# Altium PCB EPS ARM EUTS.PcbDoc
Units mil, origin at the board's own origin, x right, y up, seen from the top; angles counter-clockwise.
Board outline 3757.87 x 3555.12 mil, 4 copper layers (Top Layer, Ground, Power, Bottom Layer), stack 64.6 mil thick; 73 components, 76 nets, 354 pads, 124 vias.
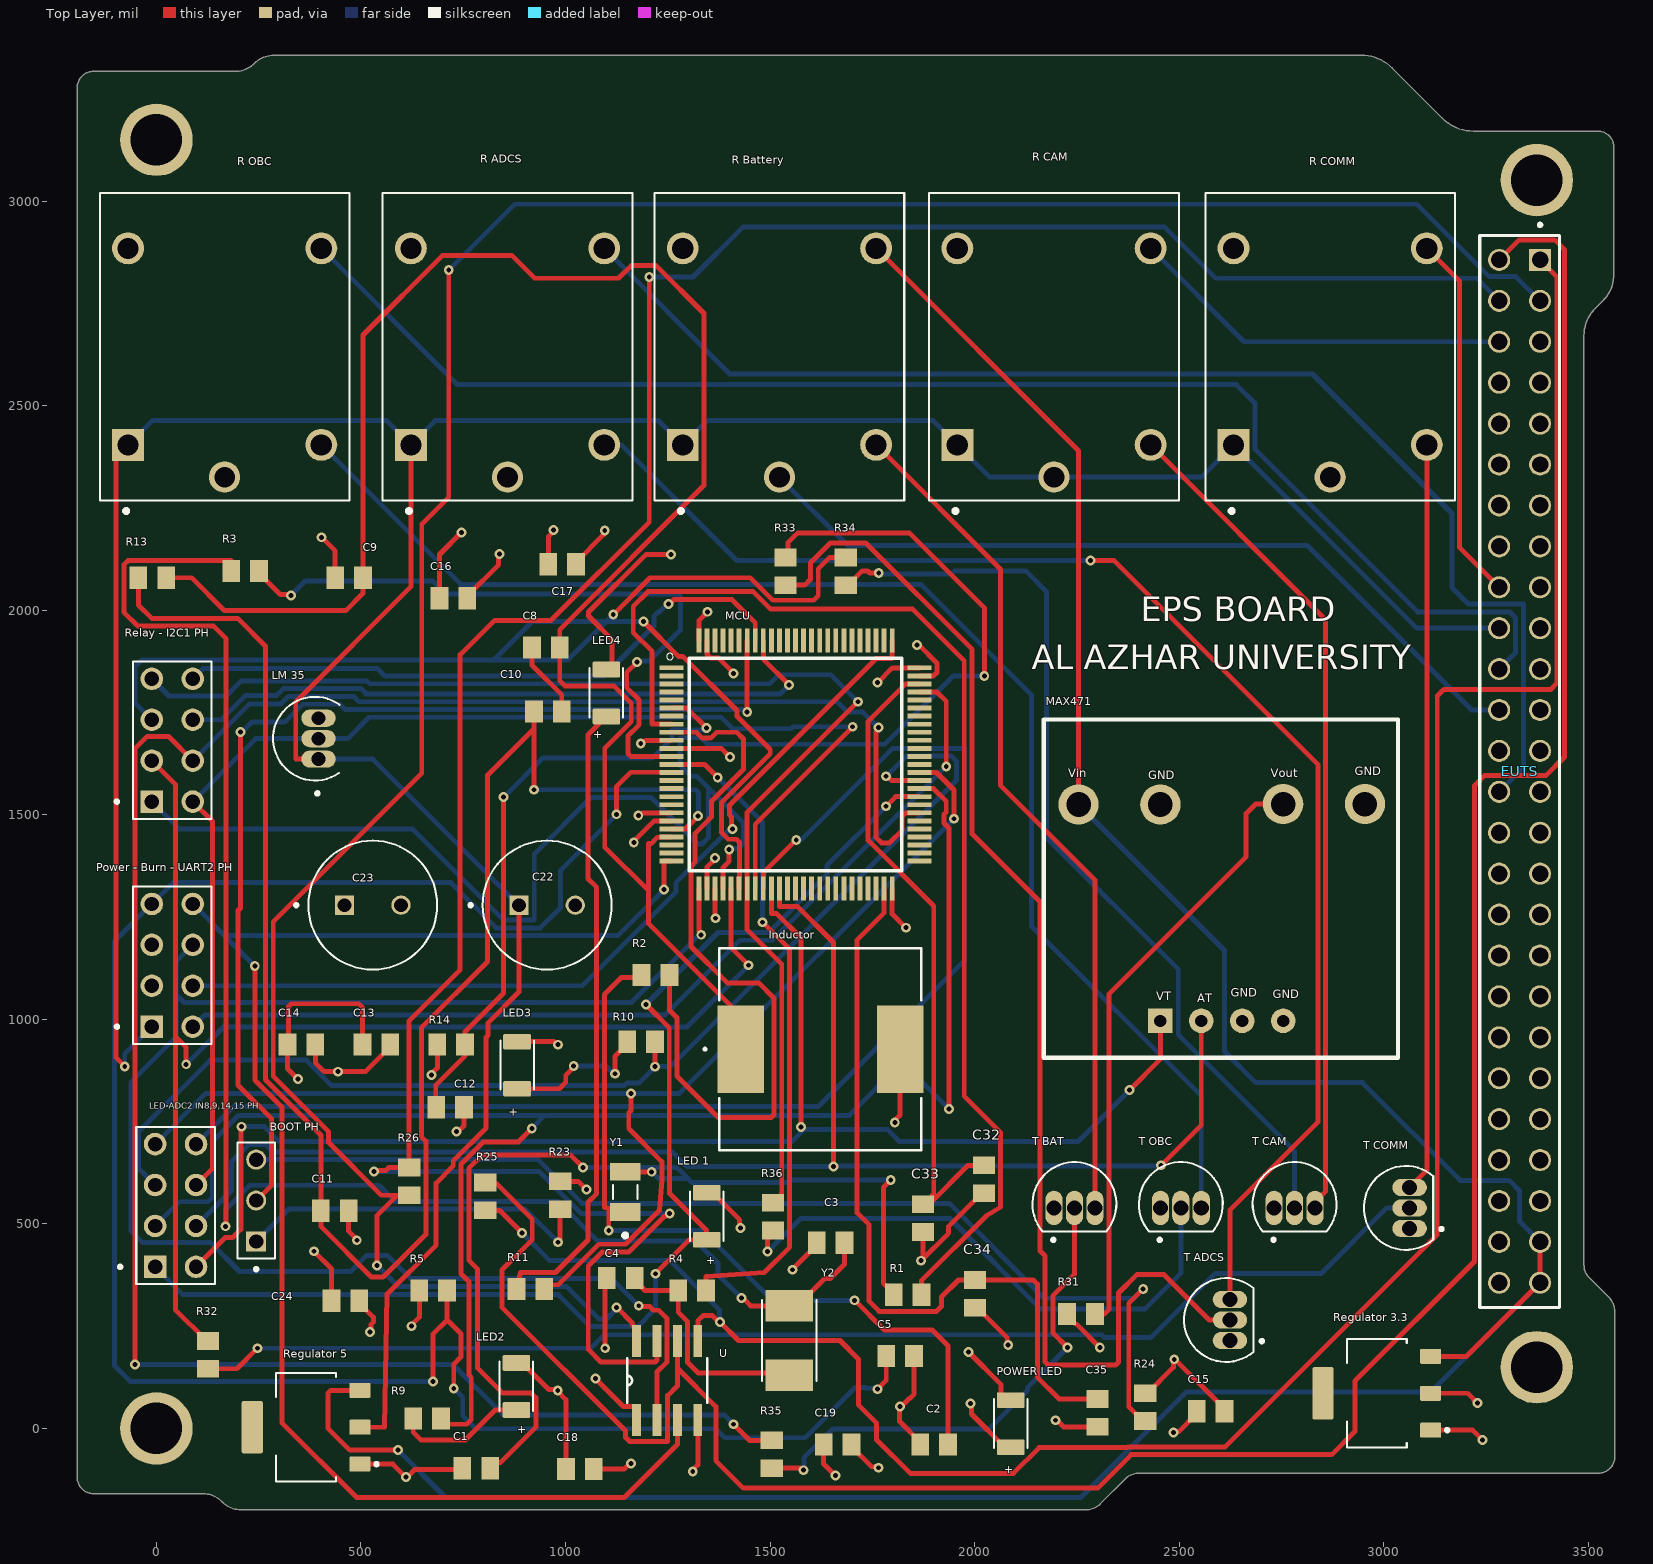
[diagram p0: Top Layer view]
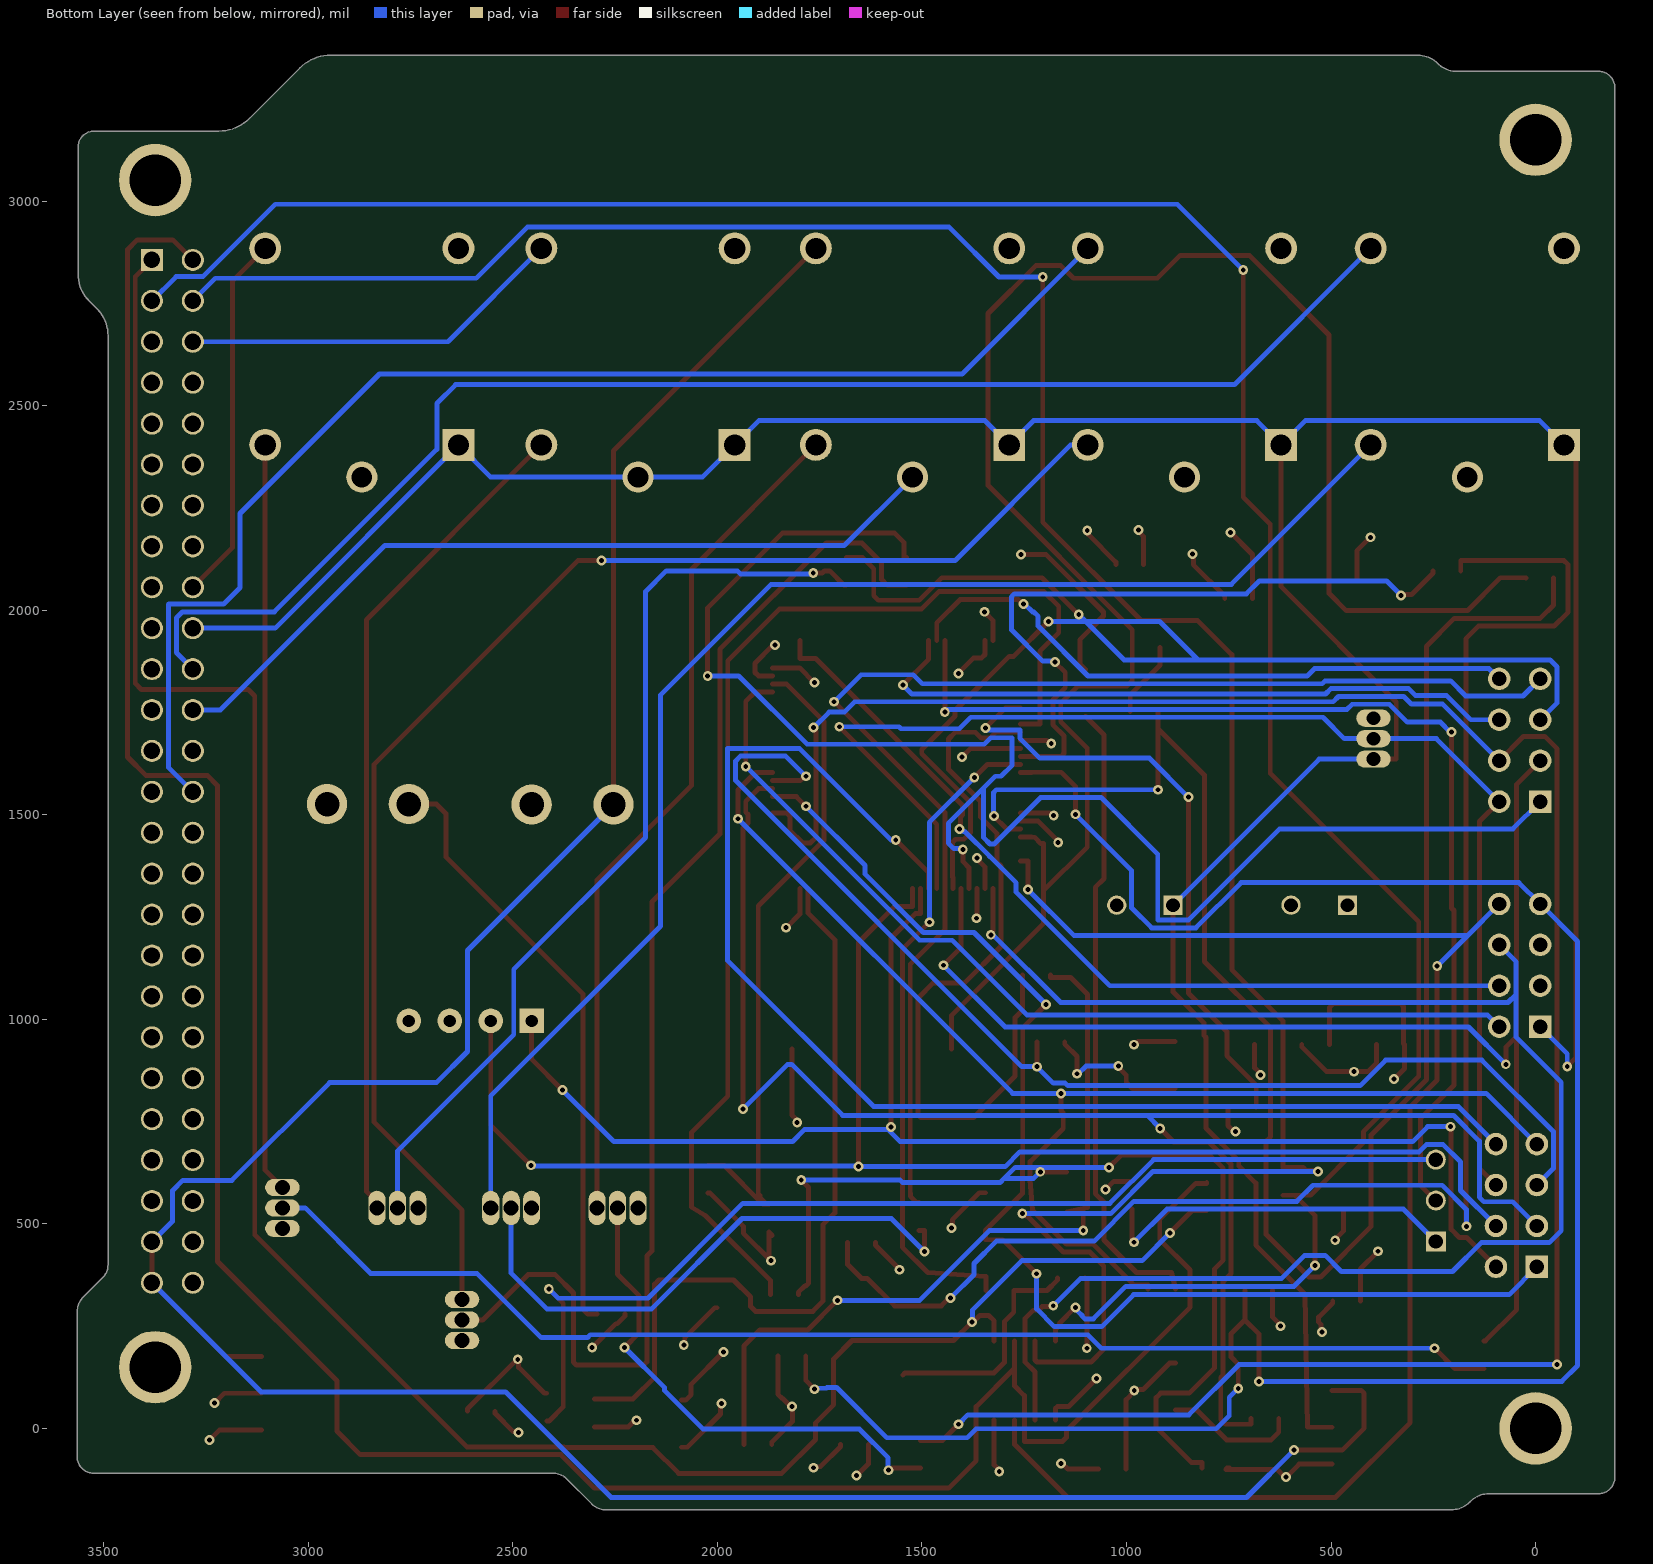
[diagram p1: Bottom Layer view, seen from below]
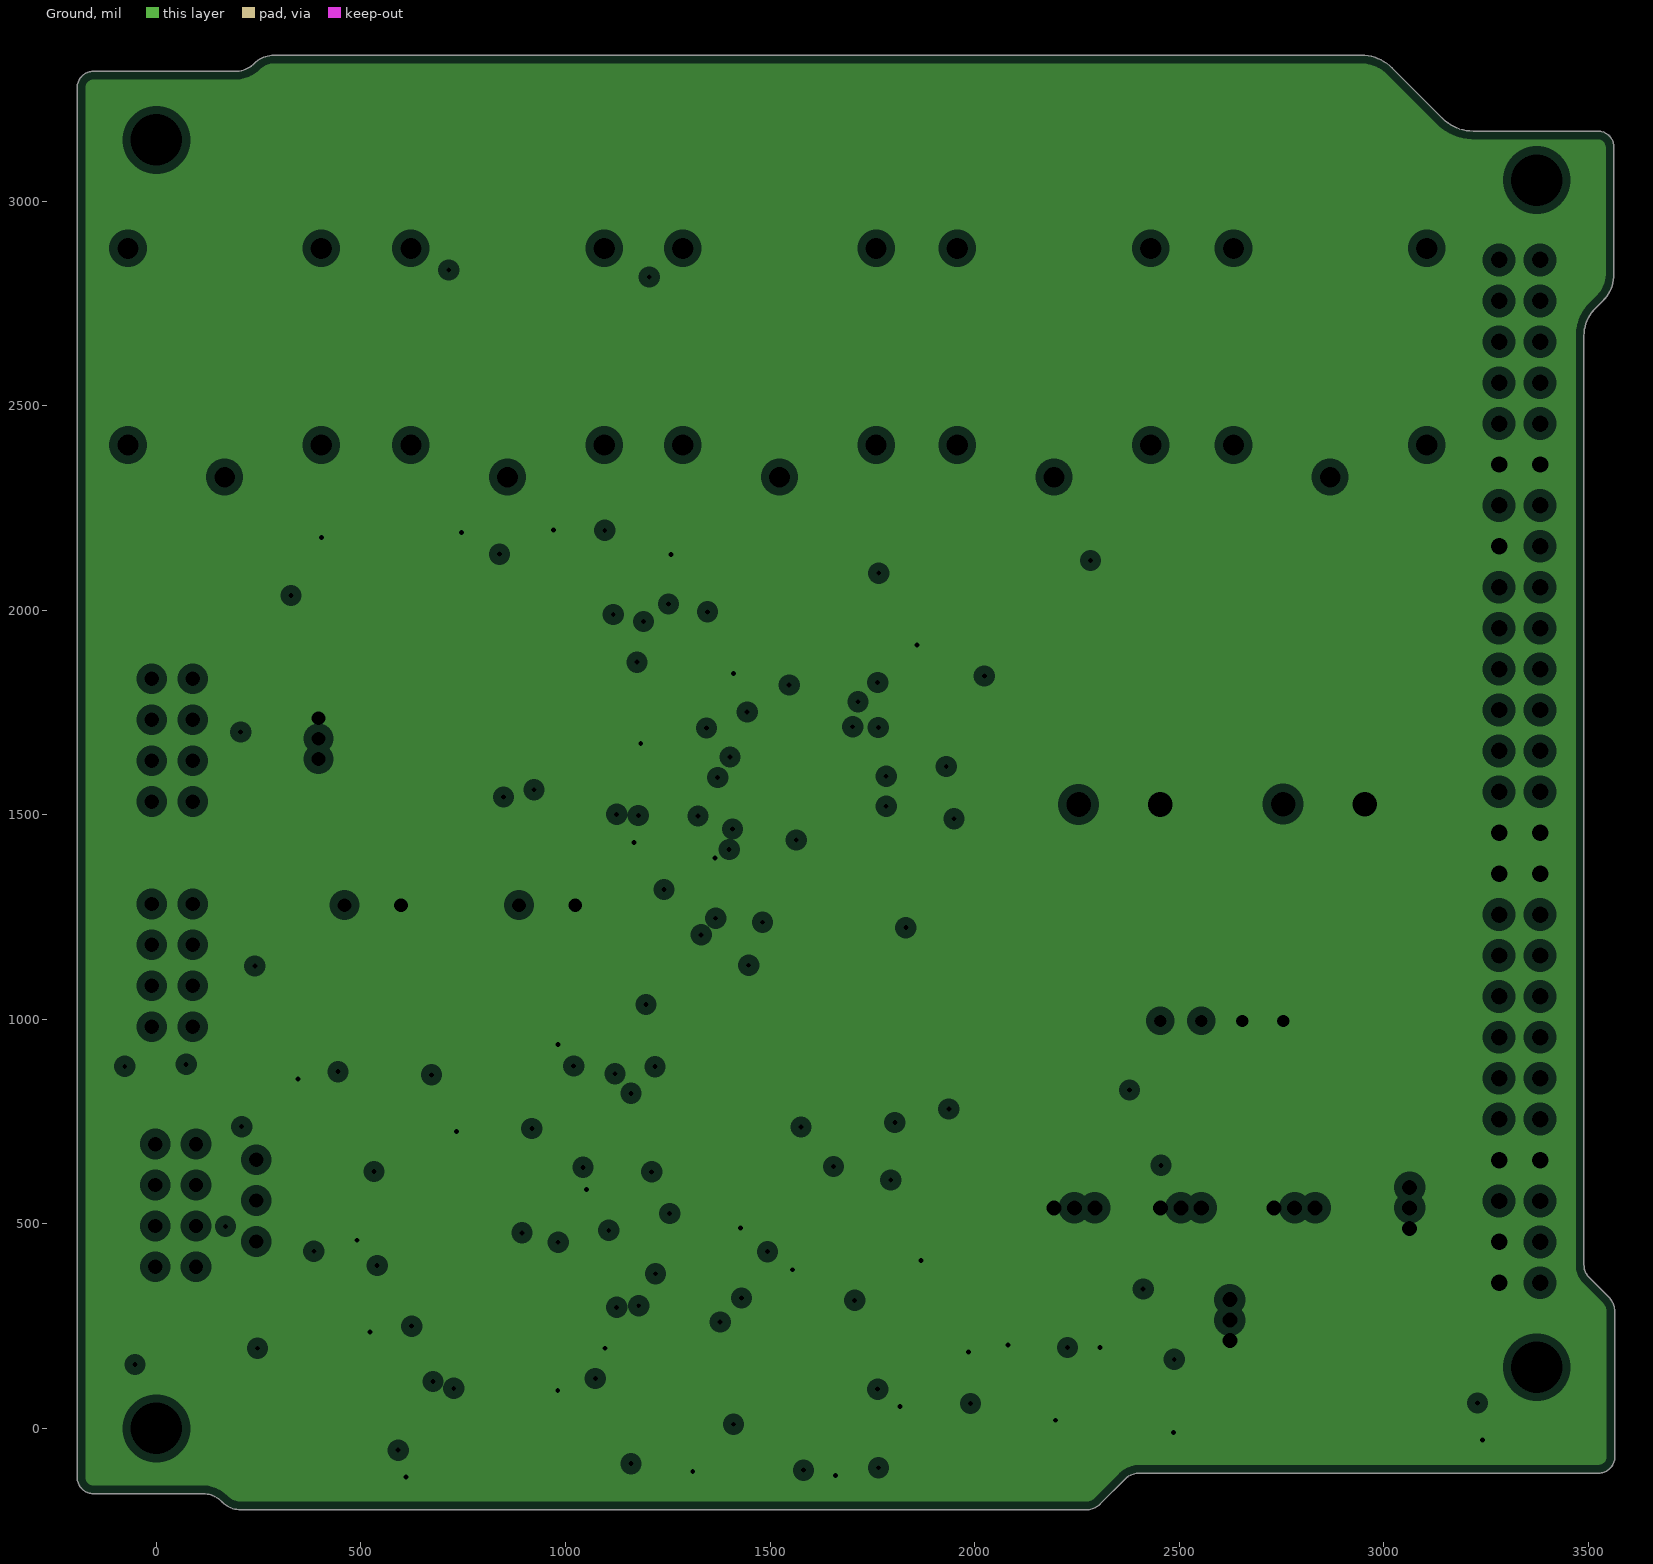
[diagram p2: Ground, clearances drawn from the general rule]
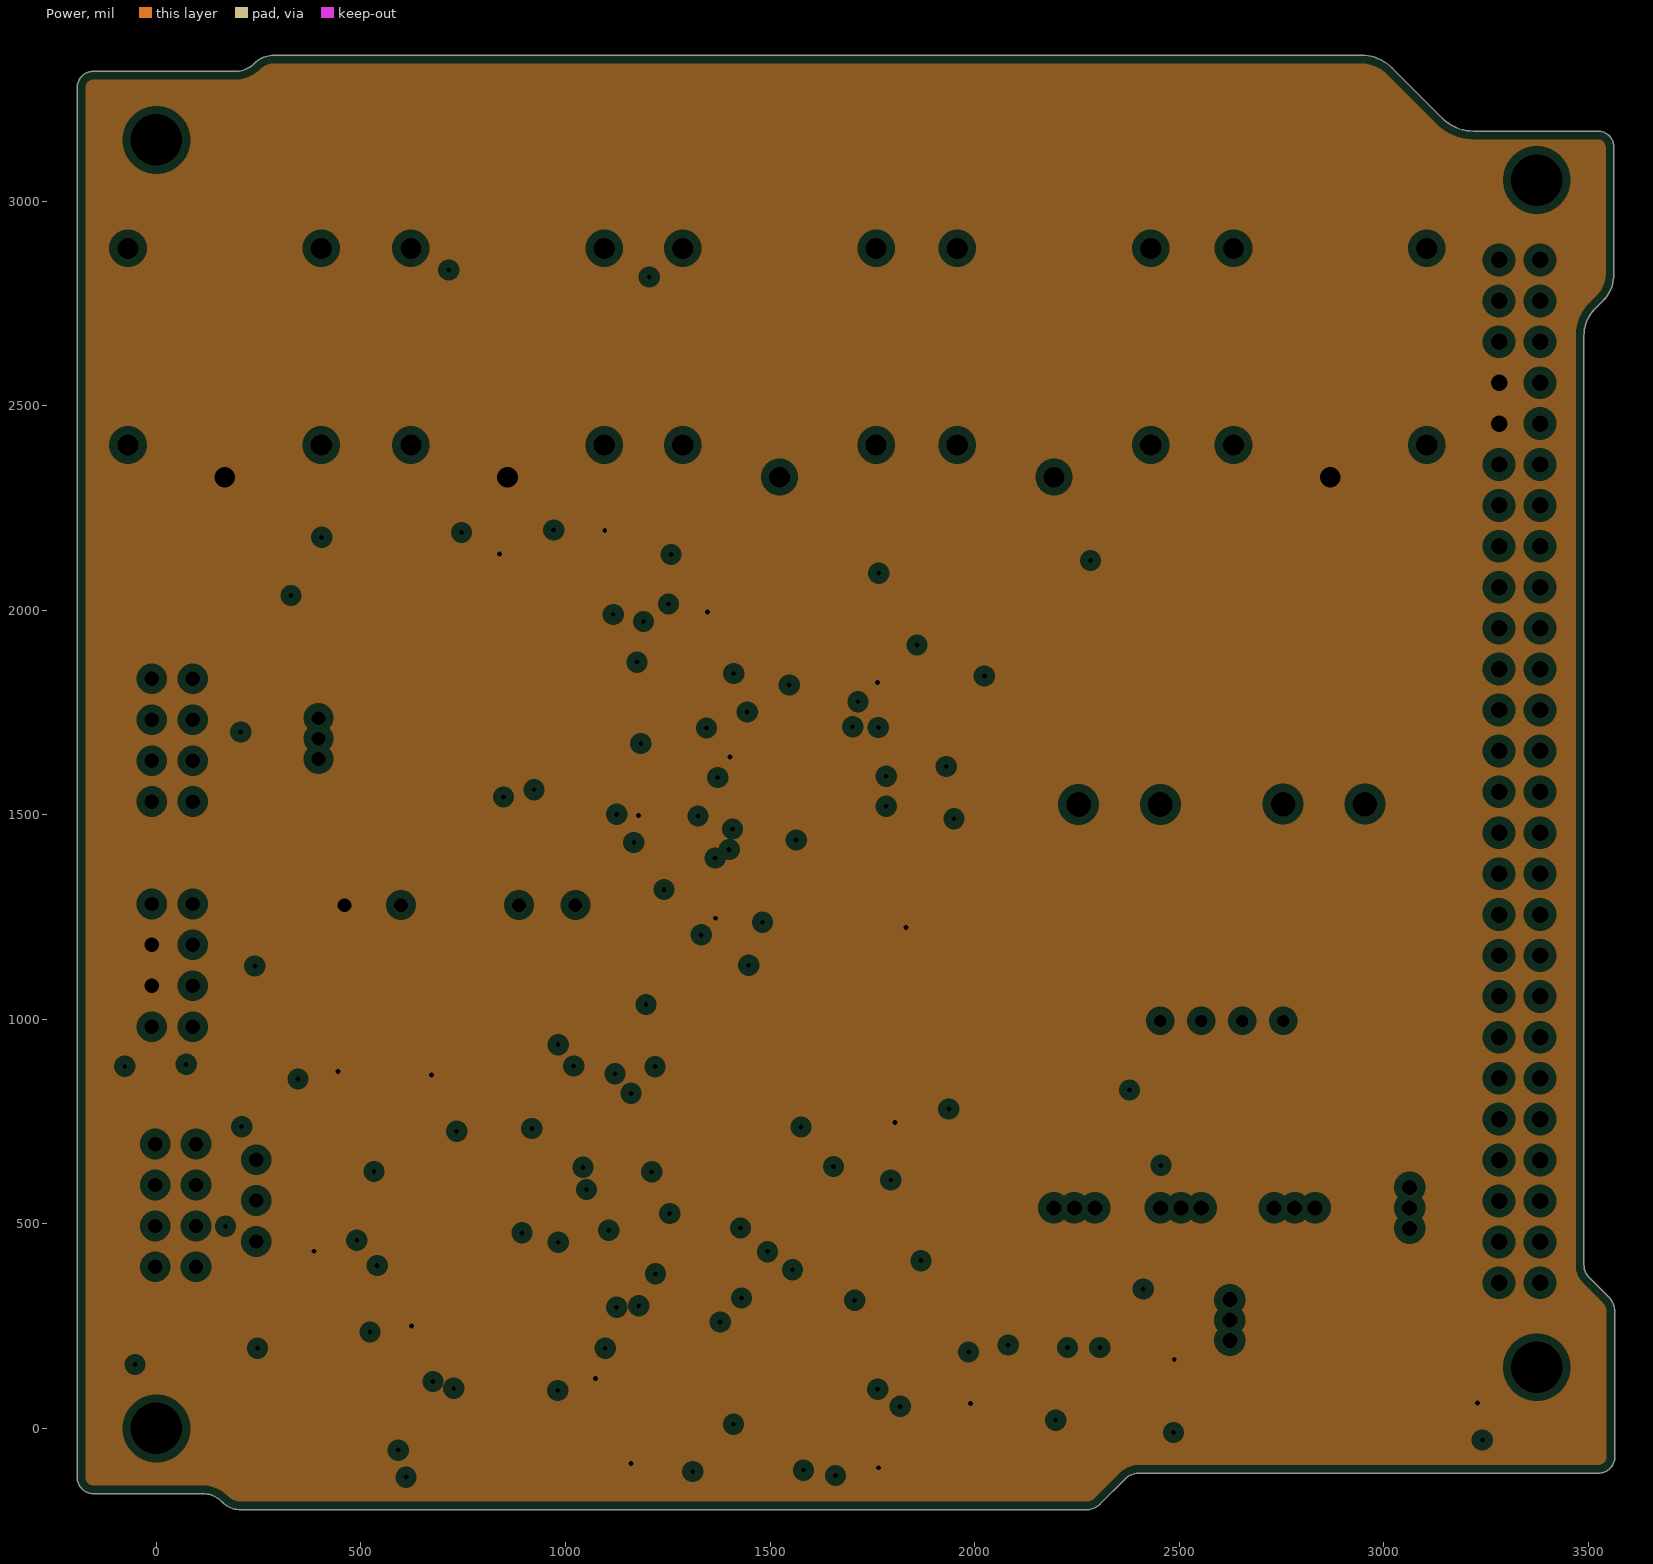
[diagram p3: Power, clearances drawn from the general rule]

## Layer stack, top to bottom
Top Solder: solder mask 0.4, Solder Resist, Dk 3.5
Top Layer: signal copper 1.4
Dielectric 1: prepreg 6.7, FR-4, Dk 4.35
Ground: plane copper 0.7, net G
Dielectric 3: core 47, FR-4, Dk 4.35
Power: plane copper 0.7, net 3.3V
Dielectric 2: prepreg 6.7, FR-4, Dk 4.35
Bottom Layer: signal copper 1.4
Bottom Solder: solder mask 0.4, Solder Resist, Dk 3.5

## Board outline
114.17,-159.45 cw(c114.17,-223.13) 159.2,-178.1 161.27,-180.17 ccw(c206.3,-135.14) 206.3,-198.82 2272.83,-198.82 ccw(c2272.83,-150.82) 2306.78,-184.76 2368.42,-123.11 cw(c2402.36,-157.05) 2402.36,-109.06 3525.2,-109.06 ccw(c3525.2,-69.68) 3564.57,-69.68 3564.57,285.43 ccw(c3513.72,285.43) 3549.67,321.39 3528.54,342.52 3502.04,369.03 cw(c3532.62,399.61) 3489.37,399.61 3489.37,2671.26 cw(c3582.52,2671.26) 3516.65,2737.12 3535.32,2755.79 ccw(c3469.45,2821.65) 3562.6,2821.65 3562.6,3131.5 ccw(c3523.23,3131.5) 3523.23,3170.87 3218.5,3170.87 cw(c3218.5,3276.37) 3143.9,3201.77 3020.27,3325.4 ccw(c2945.67,3250.8) 2945.67,3356.3 287.48,3356.3 ccw(c287.48,3289.09) 239.96,3336.61 cw(c192.44,3384.14) 192.44,3316.93 -153.94,3316.93 ccw(c-153.94,3277.56) -193.31,3277.56 -193.31,-120.08 ccw(c-153.94,-120.08) -153.94,-159.45

## Design rules (kind name [scope] priority, off if disabled: settings)
Clearance [All] p1: gap=7 ignorepadtopadclearanceinfootprint=FALSE except(0: Arc-Hole Track-Hole SMDPad-Hole THPad-Hole Via-Hole Fill-Hole Poly-Hole Region-Hole Text-Hole)
ComponentClearance [All] p1: gap=30 collisioncheckmode=3 verticalgap=30 showdistances=FALSE
DiffPairsRouting [All] p1: maxlimit=10 minlimit=10 mostfreqgap=10 toplayer_minwidth=15 toplayer_maxwidth=15 toplayer_prefwidth=15 bottomlayer_minwidth=15 bottomlayer_maxwidth=15 bottomlayer_prefwidth=15 substack1={0761D619-B0FF-4D42-81BD-1B94FE1A46B2} toplayer_{0761d619-b0ff-4d42-81bd-1b94fe1a46b2}_minwidth=15 toplayer_{0761d619-b0ff-4d42-81bd-1b94fe1a46b2}_maxwidth=15 toplayer_{0761d619-b0ff-4d42-81bd-1b94fe1a46b2}_prefwidth=15 bottomlayer_{0761d619-b0ff-4d42-81bd-1b94fe1a46b2}_minwidth=15 bottomlayer_{0761d619-b0ff-4d42-81bd-1b94fe1a46b2}_maxwidth=15 bottomlayer_{0761d619-b0ff-4d42-81bd-1b94fe1a46b2}_prefwidth=15 maxuncoupledlength=500
HoleSize [All] p1: absolutevalues=TRUE maxlimit=130 minlimit=1 maxpercent=80.000 minpercent=20.000
HoleToHoleClearance [All] p1: gap=6 allowstackedmicrovias=TRUE
MinimumSolderMaskSliver [All] p1: minsoldermaskwidth=3
PlaneClearance [All] p1: clearance=20
PlaneConnect [All] p1: planeconnectstyle=Relief reliefexpansion=20 reliefentries=4 reliefconductorwidth=10 reliefairgap=10
PolygonConnect [All] p1: connectstyle=Relief reliefconductorwidth=10 reliefentries=4 polygonreliefangle="90 Angle" airgapwidth=10
RoutingVias [All] p1: holewidth=12 width=24 viastyle="Through Hole" minholewidth=10 minwidth=10 maxholewidth=12 maxwidth=24
SilkToSilkClearance [All] p1: silktosilkclearance=4
SilkToSolderMaskClearance [IsText] p1: minsilkscreentomaskgap=4 clearancetoexposedcopper=TRUE
SolderMaskExpansion [All] p1: expansion=3 istentingtop=FALSE
Width [All] p1: maxlimit=40 minlimit=10 preferedwidth=12 substack1={0761D619-B0FF-4D42-81BD-1B94FE1A46B2} toplayer_{0761d619-b0ff-4d42-81bd-1b94fe1a46b2}_minwidth=7 bottomlayer_{0761d619-b0ff-4d42-81bd-1b94fe1a46b2}_minwidth=7 minimp=50.000000 maximp=50.000000 favimp=50.000000
21 further rules are at their usual default settings.

## Components (designator, comment, footprint, x,y, rotation, side; value= is the part's Value field where it differs from the comment)
"BOOT PH" "4-103327-5" TE_4-103327-5 244,457 r90 top
C1 "6.8pF" CAPC2012X95N 782,-97 r0 top
C2 "6.8pf" CAPC2012X95N 1901,-39 r0 top
C3 "20pF" CAPC2012X95N 1648,454 r0 top
C4 "20pf" CAPC2012X95N 1135,368 r0 top
C5 "100nF" CAPC2012X95N 1818,177 r0 top
C8 "100nF" CAPC2012X95N 952,1909 r0 top
C9 "1uF" CAPC2012X95N 471,2079 r0 top
C10 "100nF" CAPC2012X95N 957,1752 r0 top
C11 "1uF" CAPC2012X95N 436,532 r0 top
C12 "1uF" CAPC2012X95N 718,785 r0 top
C13 "100nF" CAPC2012X95N 537.69,938.18 r0 top
C14 "100nF" CAPC2012X95N 354.69,938.18 r0 top
C15 "100nF" CAPC2012X95N 2577,42 r0 top
C16 "100nF" CAPC2012X95N 726,2029 r0 top
C17 "100nF" CAPC2012X95N 992,2112 r0 top
C18 "100nF" CAPC2012X95N 1035,-99 r0 top
C19 "100nF" CAPC2012X95N 1665.02,-39 r0 top
C22 "22uF" CAPPRD350W60D800H1150 955.1,1279 r0 top
C23 "22uF" CAPPRD350W60D800H1150 529,1279 r0 top
C24 "100nF" CAPC2012X95N 462,312 r0 top
C32 "1uF" CAPC2012X95N 2023,609 r90 top
C33 "1uF" CAPC2012X95N 1874,514 r90 top
C34 "1uF" CAPC2012X95N 2001,329 r90 top
C35 "1uF" CAPC2012X95N 2300,38 r90 top
EUTS "ESQ-126-39-G-D" SAMTEC_ESQ-126-39-G-D 3382,2856 r90 top locked
Inductor "CDRH127/LDNP-470MC" IND_CDRH127/LDNP-470MC_SUM 1623,927 r0 top
LED2 "RED-LED" RESC3015X65 880,103 r90 top
LED3 "GREEN-LED" RESC3015X65 881.69,888.18 r90 top
LED4 "ORANGE-LED" RESC3015X65 1100,1797.91 r90 top
"LED 1" "BLUE-LED" RESC3015X65 1345,519 r90 top
"LED-ADC2 IN8,9,14,15 PH" "5-146256-4" TE_5-146256-4 47,545 r90 top
"LM 35" "LM35DZ/NOPB" TO92127P521H735-3 366,1686 r90 top
MAX471 "MAX471?" PCBComponent_1 2454,1141.14 r0 top
MCU "STM32F427VGT7" QFP50P1600X1600X160-100N 1562.26,1622.85 r0 top
"Power - Burn - UART2 PH" "5-146256-4" TE_5-146256-4 39,1132 r90 top
"POWER LED" "BLUE-LED" RESC3015X65 2088,12 r90 top (schematic designator "Power LED")
R1 "0" CAPC2012X95N 1836,327 r0 top
R2 "0" CAPC2012X95N 1220,1108 r0 top
R3 "0" CAPC2012X95N 217,2096 r0 top
R4 "0" CAPC2012X95N 1309.69,337.18 r0 top
R5 "10K" CAPC2012X95N 676.69,337.18 r0 top
R9 "22" CAPC2012X95N 662,24 r0 top
R10 "22" CAPC2012X95N 1185,945 r0 top
R11 "22" CAPC2012X95N 914,341 r0 top
R13 "0" CAPC2012X95N -10,2079 r0 top
R14 "0" CAPC2012X95N 720.69,938.18 r0 top
R23 "10k" CAPC2012X95N 987,570 r90 top
R24 "10k" CAPC2012X95N 2417,52 r90 top
R25 "100" CAPC2012X95N 804,567 r90 top
R26 "100" CAPC2012X95N 618,604 r90 top
R31 "330" CAPC2012X95N 2260,280 r0 top
R32 "1K" CAPC2012X95N 126,180 r90 top
R33 "1K" CAPC2012X95N 1538,2095 r90 top
R34 "1K" CAPC2012X95N 1685,2095 r90 top
R35 "1K" CAPC2012X95N 1504,-63 r90 top
R36 "1K" CAPC2012X95N 1507,518 r90 top
"R ADCS" "SRD-05VDC-SL-C" RELAY_MOD 858.42,2644 r90 top
"R Battery" "SRD-05VDC-SL-C" RELAY_MOD 1522.89,2644 r90 top
"R CAM" "SRD-05VDC-SL-C" RELAY_MOD 2194,2644 r90 top
"R COMM" "SRD-05VDC-SL-C" RELAY_MOD 2869,2644 r90 top
"R OBC" "SRD-05VDC-SL-C" RELAY_MOD 167,2644 r90 top
"Regulator 3.3" "AMS1117-3.3" SOT229P700X180-4N 2983,86 r90 top
"Regulator 5" "AMS1117-5.0" SOT229P700X180-4N 366,3 r90 top
"Relay - I2C1 PH" "5-146256-4" TE_5-146256-4 39,1682.13 r90 top
"T ADCS" "PN2222A" TO92127P521H733-3 2596.83,265 r90 top
"T BAT" "PN2222A" TO92127P521H733-3 2243.98,566.16 r0 top
"T CAM" "PN2222A" TO92127P521H733-3 2782,566.16 r0 top
"T COMM" "PN2222A" TO92127P521H733-3 3036,539 r90 top
"T OBC" "PN2222A" TO92127P521H733-3 2504,566.16 r0 top
U "MAX488ESA+" SOIC127P600X175-8N 1248.69,117.18 r90 top
Y1 "32.768kHz" XTAL_ECS-.327-12.5-34S-TR 1146,578 r90 top
Y2 "8MHZ" XTAL500X320X130N 1546.94,215 r90 top

## Footprints (in the part's own frame and the unit in brackets; to place one, negate y for a bottom-side part, rotate by r counter-clockwise, add the part's x,y. Pads: shape width x height; smd on the part's side, far side on the other; paste and mask are expansions set on the pad)
CAPC2012X95N [mm]
  rect 1.1x1.38 smd: 1(-0.863,0) 2(0.863,0)
CAPPRD350W60D800H1150 [mm]
  round 1.2 hole 0.85: N(1.75,0)
  rect 1.2x1.2 hole 0.85: P(-1.75,0)
  silkscreen extent -4.85,-4 4,4, body extent -4,-4 4,4, height 11.5
IND_CDRH127/LDNP-470MC_SUM [mil]
  rect 114x213 smd: 1(-195,0) 2(195,0)
  silkscreen extent -285,-247 247,247
PCBComponent_1 [mil]
  rect 60x60 hole 30: 1(0,-145)
  round 60 hole 30: 2(100,-145) 3(200,-145) 4(300,-145)
  round 98.43 hole 60: 5(500,385) 6(300,385) 7(0,383.86) 8(-200,383.86)
  silkscreen extent -285,-235 581,592
QFP50P1600X1600X160-100N [mm]
  rect 1.5x0.3 smd mask+0.049: 1(-7.7,6) 2(-7.7,5.5) 3(-7.7,5) 4(-7.7,4.5) 5(-7.7,4) 6(-7.7,3.5) 7(-7.7,3) 8(-7.7,2.5) 9(-7.7,2) 10(-7.7,1.5) 11(-7.7,1) 12(-7.7,0.5) 13(-7.7,0) 14(-7.7,-0.5) 15(-7.7,-1) 16(-7.7,-1.5) 17(-7.7,-2) 18(-7.7,-2.5) 19(-7.7,-3) 20(-7.7,-3.5) 21(-7.7,-4) 22(-7.7,-4.5) 23(-7.7,-5) 24(-7.7,-5.5) 25(-7.7,-6) 51(7.7,-6) 52(7.7,-5.5) 53(7.7,-5) 54(7.7,-4.5) 55(7.7,-4) 56(7.7,-3.5) 57(7.7,-3) 58(7.7,-2.5) 59(7.7,-2) 60(7.7,-1.5) 61(7.7,-1) 62(7.7,-0.5) 63(7.7,0) 64(7.7,0.5) 65(7.7,1) 66(7.7,1.5) 67(7.7,2) 68(7.7,2.5) 69(7.7,3) 70(7.7,3.5) 71(7.7,4) 72(7.7,4.5) 73(7.7,5) 74(7.7,5.5) 75(7.7,6)
  rect 0.3x1.5 smd mask+0.049: 26(-6,-7.7) 27(-5.5,-7.7) 28(-5,-7.7) 29(-4.5,-7.7) 30(-4,-7.7) 31(-3.5,-7.7) 32(-3,-7.7) 33(-2.5,-7.7) 34(-2,-7.7) 35(-1.5,-7.7) 36(-1,-7.7) 37(-0.5,-7.7) 38(0,-7.7) 39(0.5,-7.7) 40(1,-7.7) 41(1.5,-7.7) 42(2,-7.7) 43(2.5,-7.7) 44(3,-7.7) 45(3.5,-7.7) 46(4,-7.7) 47(4.5,-7.7) 48(5,-7.7) 49(5.5,-7.7) 50(6,-7.7) 76(6,7.7) 77(5.5,7.7) 78(5,7.7) 79(4.5,7.7) 80(4,7.7) 81(3.5,7.7) 82(3,7.7) 83(2.5,7.7) 84(2,7.7) 85(1.5,7.7) 86(1,7.7) 87(0.5,7.7) 88(0,7.7) 89(-0.5,7.7) 90(-1,7.7) 91(-1.5,7.7) 92(-2,7.7) 93(-2.5,7.7) 94(-3,7.7) 95(-3.5,7.7) 96(-4,7.7) 97(-4.5,7.7) 98(-5,7.7) 99(-5.5,7.7) 100(-6,7.7)
  silkscreen extent -8,-6.6 6.6,6.9
RELAY_MOD [mm]
  rect 1.98x1.98 hole 1.32: A1(-6.1,6)
  round 1.98 hole 1.32: A2(-6.1,-6) NC(6.1,6) NO(6.1,-6)
  round 1.935 hole 1.29: COM(-8.1,0)
  silkscreen extent -10.3,-7.75 9.55,7.75
RESC3015X65 [mm]
  rrect20% 0.98x1.72 smd: 1(-1.47,0) 2(1.45,0)
  silkscreen extent -1.53,-1.04 1.53,1.04
SAMTEC_ESQ-126-39-G-D [mm]
  rect 1.37x1.37 hole 1.02: 01(0,0)
  round 1.37 hole 1.02: 02(0,2.54) 03(-2.54,0) 04(-2.54,2.54) 05(-5.08,0) 06(-5.08,2.54) 07(-7.62,0) 08(-7.62,2.54) 09(-10.16,0) 10(-10.16,2.54) 11(-12.7,0) 12(-12.7,2.54) 13(-15.24,0) 14(-15.24,2.54) 15(-17.78,0) 16(-17.78,2.54) 17(-20.32,0) 18(-20.32,2.54) 19(-22.86,0) 20(-22.86,2.54) 21(-25.4,0) 22(-25.4,2.54) 23(-27.94,0) 24(-27.94,2.54) 25(-30.48,0) 26(-30.48,2.54) 27(-33.02,0) 28(-33.02,2.54) 29(-35.56,0) 30(-35.56,2.54) 31(-38.1,0) 32(-38.1,2.54) 33(-40.64,0) 34(-40.64,2.54) 35(-43.18,0) 36(-43.18,2.54) 37(-45.72,0) 38(-45.72,2.54) 39(-48.26,0) 40(-48.26,2.54) 41(-50.8,0) 42(-50.8,2.54) 43(-53.34,0) 44(-53.34,2.54) 45(-55.88,0) 46(-55.88,2.54) 47(-58.42,0) 48(-58.42,2.54) 49(-60.96,0) 50(-60.96,2.54) 51(-63.5,0) 52(-63.5,2.54)
  silkscreen extent -65.02,-1.21 2.27,3.74
SOIC127P600X175-8N [mil]
  rect 78x21 smd: 1(-97,75) 2(-97,25) 3(-97,-25) 4(-97,-75) 5(97,-75) 6(97,-25) 7(97,25) 8(97,75)
  silkscreen extent -55,-98 55,98
SOT229P700X180-4N [mm]
  rrect15% 0.93x1.31 smd: 1(-2.29,-3.345) 2(0,-3.345) 3(2.29,-3.345)
  rrect15% 3.24x1.31 smd: 4(0,3.345)
  silkscreen extent -3.36,-4.47 3.36,1.86
TE_4-103327-5 [mm]
  rect 1.24x1.24 hole 0.89: 1(0,0)
  round 1.24 hole 0.89: 2(2.54,0) 3(5.08,0)
  silkscreen extent -1.82,-1.17 6.15,1.17
TE_5-146256-4 [mil]
  rect 55.04x55.04 hole 35.04: 1(-150,50)
  round 55.04 hole 35.04: 2(-50,50) 3(50,50) 4(150,50) 5(-150,-50) 6(-50,-50) 7(50,-50) 8(150,-50)
  silkscreen extent -192,-96 192,139
TO92127P521H733-3 [mm]
  oval 1.07x2.14 hole 0.94 mask+0.051: 1(-1.27,-0.69) 2(0,-0.69) 3(1.27,-0.69)
  silkscreen extent -2.6,-2.77 2.6,2.15
TO92127P521H735-3 [mm]
  oval 1.07x2.14 hole 0.85 mask+0.051: 1(-1.27,-0.775) 2(0,-0.775) 3(1.27,-0.775)
  silkscreen extent -3.5,-2.08 2.6,2.04, body extent -2.4,-1.53 2.4,2.4, height 8
XTAL500X320X130N [mm]
  rect 1.95x2.95 smd: 1(-2.15,0) 2(2.15,0)
  silkscreen extent -2.5,-1.7 2.5,1.7
XTAL_ECS-.327-12.5-34S-TR [mm]
  rect 1.1x1.9 smd: 1(-1.25,0) 2(1.25,0)
  silkscreen extent -2.8,-0.75 0.44,0.75

## Part data
"BOOT PH": "Conn Unshrouded Header HDR 3 POS 2.54mm Solder ST Thru-Hole Carton", Package=None, Availability=Unavailable, EU_RoHS_Compliance=Compliant, MF="TE Connectivity", MP=4-103327-5, Price=None, SnapEDA_Link=https://www.snapeda.com/parts/4-103327-5/TE%20Connectivity%20AMP%20Connectors/view-part/2403997/?ref=snap, TE_purchase_URL=https://www.te.com/usa-en/product-4-103327-5.html?te_bu=Cor&te_type=disp&te_campaign=seda_glo_cor-seda-global-disp-prtnr-fy19-seda-model-bom-cta_sma-317_1&elqCampaignId=32493
C1 C2 C3 C4 C5 C8 C9 C10 C11 C12 C13 C14 C15 C16 C17 C18 C19 C24 C32 C33 C34 C35: library part UMK212SD103KD-T, "CAP CER 10000PF 50V 0805", Package=None, Availability=Unavailable, MP=UMK212SD103KD-T, Price=None
C22 C23: library part ECA1HM101, "100ÂµF 50V Aluminum Electrolytic Capacitors Radial, Can 2000 Hrs @ 85Â°C", Package="RADIAL-2 Panasonic", Availability="No availability data", Check_prices=https://www.snapeda.com/parts/ECA1HM101/Panasonic/view-part/4478734/?ref=eda, MF=Panasonic, MP=ECA1HM101, Price=None, SnapEDA_Link=https://www.snapeda.com/parts/ECA1HM101/Panasonic/view-part/4478734/?ref=snap
EUTS: "52 Position Elevated Socket Connector Through Hole", Package=None, Availability=Unavailable, MF=Samtec, MP=ESQ-126-39-G-D, Price=None, SnapEDA_Link=https://www.snapeda.com/parts/ESQ-126-39-G-D/Samtec%20Inc./view-part/490181/?ref=snap
Inductor: "47ÂµH Shielded Inductor 3.25A 78mOhm Max Nonstandard", Package="Nonstandard Sumida", Check_prices=https://www.snapeda.com/parts/CDRH127/LDNP-470MC/Sumida%20America%20Components%20Inc./view-part/547921/?ref=eda, Digi-Key_Part_Number=308-1339-1-ND, MF="Sumida America", MP=CDRH127/LDNP-470MC, Purchase-URL=https://pricing.snapeda.com/search/part/CDRH127/LDNP-470MC/?ref=eda, SnapEDA_Link=https://www.snapeda.com/parts/CDRH127/LDNP-470MC/Sumida%20America%20Components%20Inc./view-part/547921/?ref=snap
LED2 LED3 LED4 "LED 1" "POWER LED": library part LTST-C150TBKT, "LED Blue 470nm LED Indication 3.3V"
"LED-ADC2 IN8,9,14,15 PH" "Power - Burn - UART2 PH" "Relay - I2C1 PH": "08 MODII HDR DRST B/A .100CL LF", Package=None, Availability=Unavailable, MF="TE Connectivity", MP=5-146256-4, Price=None, SnapEDA_Link=https://www.snapeda.com/parts/5-146256-4/TE%20Connectivity%20AMP%20Connectors/view-part/500529/?ref=snap
"LM 35": "Temperature Sensor Analog, Local 0Â°C ~ 100Â°C 10mV/Â°C TO-92-3", Package="E-PKG AXIAL-LEADED-2 ON Semiconductor", Availability="Not in stock", Check_prices=https://www.snapeda.com/parts/LM35DZ/Texas+Instruments/view-part/?ref=eda, MF="Texas Instruments", MP=LM35DZ, Price=None, SnapEDA_Link=https://www.snapeda.com/parts/LM35DZ/Texas+Instruments/view-part/?ref=snap
MAX471: "MAX471 Voltage And Current Sensor Module Consume Voltage Load Detection Module"
MCU: "ARMÂ® CortexÂ®-M4 STM32F4 Microcontroller IC 32-Bit 180MHz 1MB _1M x 8_ FLASH 100-LQFP _14x14_", Package="LQFP-100 STMicroelectronics", Availability=Unavailable, MF=STMicroelectronics, MP=STM32F427VGT7, Price=None, SnapEDA_Link=https://www.snapeda.com/parts/STM32F427VGT7/STMicroelectronics/view-part/567621/?ref=snap
R1 R2 R3 R4 R5 R9 R10 R11 R13 R14 R23 R24 R25 R26 R31 R32 R33 R34 R35 R36: library part RESISTOR
"R ADCS" "R Battery" "R CAM" "R COMM" "R OBC": "5V Trigger Relay Module For Arduino And Raspberry Pi 5V Trigger Relay Module For Arduino And Raspberry Pi", Package=None, Availability="Not in stock", Check_prices=https://www.snapeda.com/parts/SRD-05VDC-SL-C/Songle+Relay/view-part/?ref=eda, MF="Songle Relay", MP=SRD-05VDC-SL-C, Price=None, SnapEDA_Link=https://www.snapeda.com/parts/SRD-05VDC-SL-C/Songle+Relay/view-part/?ref=snap
"Regulator 3.3": "Sot223/Pkg 1-Amp 3.3-Volt Low Drop Out Voltage Regulatator", Package=None, Availability=Unavailable, MF="Advanced Monolithic Systems", MP=AMS1117-3.3, Price=None, SnapEDA_Link=https://www.snapeda.com/parts/AMS1117-3.3/Advanced%20Monolithic%20Systems/view-part/53450/?ref=snap
"Regulator 5": "Sot223/Pkg 1-Amp 5-Volt Low Drop Out Voltage Regulatator", Package=None, Availability=Unavailable, MF="Advanced Monolithic Systems", MP=AMS1117-5.0, Price=None, SnapEDA_Link=https://www.snapeda.com/parts/AMS1117-5.0/Advanced%20Monolithic%20Systems/view-part/184433/?ref=snap
"T ADCS" "T BAT" "T CAM" "T COMM" "T OBC": "Bipolar _BJT_ Transistor NPN 40V 600mA 270MHz 500mW Through Hole TO-92-3", Package="TO-92 Rectron", Availability=Unavailable, MF=STMicroelectronics, MP=PN2222A, Price=None, SnapEDA_Link=https://www.snapeda.com/parts/PN2222A/STMicroelectronics/view-part/1782474/?ref=snap
U: "1/1 Transceiver Full RS422, RS485 8-SOIC", Package="SOIC-8 Maxim", Availability=Unavailable, MF="Maxim Integrated", MP=MAX488ESA+T, Price=None, SnapEDA_Link=https://www.snapeda.com/parts/MAX488ESA+T/Maxim%20Integrated/view-part/48834/?ref=snap
Y1: library part ECS-.327-12.5-34S-TR, "32.768kHz Â±20ppm Crystal 12.5pF 70 kOhms 2-SMD, No Lead", Package="SMD-2 ECS International", Availability=Unavailable, MF="ECS Inc.", MP=ECS-.327-12.5-34S-TR, Price=None, SnapEDA_Link=https://www.snapeda.com/parts/ECS-.327-12.5-34S-TR/ECS%20Inc./view-part/2454548/?ref=snap
Y2: library part ABM3-8.000MHZ-D2Y-T, "8MHz Â±20ppm Crystal 18pF 140 Ohms 2-SMD, No Lead", Package="SMD-2 Abracon", Digi-Key_Part_Number=535-10630-1-ND, Digi-Key_Purchase_URL=https://www.digikey.com/product-detail/en/abracon-llc/ABM3-8.000MHZ-D2Y-T/535-10630-1-ND/2344632?utm_source=snapeda&utm_medium=aggregator&utm_campaign=symbol, MF=Abracon, MP=ABM3-8.000MHZ-D2Y-T, SnapEDA_Link=https://www.snapeda.com/parts/ABM3-8.000MHZ-D2Y-T/Abracon%20LLC/view-part/106372/?ref=snap

## Free pads (board coordinates)
  round 177.17 hole 125.98 unplated: 1(0,0) 2(0,3149.61) 3(3374.01,3051.18) 4(3374.01,149.61)

## Via types
v1: diameter 24, hole 12, Top Layer to Bottom Layer, 124 vias

## Nets (pads, with @x,y where several pads share a name; then routed paths per layer and width w, separated by ;. In a path a pad name is that pad's centre, name@x,y a point inside that pad or via, vN(x,y) a via of type N, cw(c..) or ccw(c..) an arc to the next point about the centre after c; other vN are vias at no path point)
3.3V: "Power - Burn - UART2 PH.2" "Power - Burn - UART2 PH.3" "POWER LED.1" "R ADCS.COM" "R COMM.COM" "R OBC.COM" "Regulator 3.3.2" C13.2 C14.2 C15.2 C16.2 C17.2 C18.2 C19.2 C23.P C24.1 EUTS.08 EUTS.10 Inductor.2 MCU.11 MCU.19 MCU.28 MCU.50 MCU.75 MCU.100 R5.1 R14.1 R24.2 U.1 | length 2555.7
  Top Layer w12: v1(385,433) 428.02,389.98 C24.1 ; C14.2 388.67,894.02 410.68,872 v1(444,872) 511,872 571.67,932.67 C13.2 ; v1(624,250) 624,253.25 642.72,271.96 R5.1 ; v1(672.69,864.2) 672.69,867.45 686.72,881.48 R14.1 ; C16.2 759.98,2034.51 836.7,2111.24 836.7,2134.7 v1(839,2137) ; C17.2 1025.98,2117.51 1093.7,2185.24 1093.7,2192.7 v1(1096,2195) ; C18.2 1143.75,-99 1156.75,-86 v1(1160,-86) ; v1(1073,122) 1141.82,53.18 1169.19,53.18 1173.69,48.68 U.1 ; v1(1178,1498) 1181.25,1498 1187.99,1504.74 MCU.19 ; MCU.11 1380.78,1662.22 v1(1402,1641) ; MCU.100 1326.04,1974.53 1347,1995.5 v1(1347,1996) ; MCU.28 1365.5,1319.61 1365.5,1248.5 v1(1367,1247) ; C19.2 1699,-44.51 1748.19,-93.7 1762.7,-93.7 v1(1765,-96) ; v1(1763,1823) 1799.07,1859.07 MCU.75 ; MCU.50 1798.48,1257.52 v1(1832,1224) ; v1(1805,748) 1807.3,750.3 1807.3,755.54 1818,766.25 Inductor.2 ; v1(1990,61) 1992.3,58.7 1992.3,35.26 2073.43,-45.87 2088,-45.87 ; R24.2 2422.51,85.98 2485.7,149.17 2485.7,166.7 v1(2488,169) 2489.49,169 2610.98,47.51 C15.2 ; 3114.69,86 3205,86 v1(3229,62)
"3.3V (ADCS)": "R ADCS.NO" EUTS.28 | length 3196.5
  Bottom Layer w12: 1094.64,2884.16 1401.61,2577.18 2825.69,2577.18 3166.69,2236.18 3166.69,2054.97 3206.69,2014.97 3340.97,2014.97 3341.69,2014.25 3341.69,1615.69 EUTS.28
"3.3V (COMM)": "R COMM.NO" EUTS.18 | length 901.4
  Top Layer w12: 3105.22,2884.16 3184.69,2804.69 3184.69,2153.31 EUTS.18
"3.3V (OBC)": "R OBC.NO" EUTS.22 | length 3500.1
  Bottom Layer w12: 403.22,2884.16 736.2,2551.18 2639.69,2551.18 2685.69,2505.18 2685.69,2393.18 3082.9,1995.97 3307.18,1995.97 3321.97,1981.18 3321.97,1895.97 EUTS.22
5V: "LM 35.1" "Power - Burn - UART2 PH.1" "R ADCS.A1" "R Battery.A1" "R CAM.A1" "R CAM.COM" "R COMM.A1" "R OBC.A1" "Regulator 5.2" C22.P EUTS.20 | length 8461
  Top Layer w12: v1(-77.31,885) -77.31,885.43 -98.31,906.43 -98.31,2374.76 -69.22,2403.84 ; 396.51,1636 340.69,1636 340.69,1775.68 622.2,2057.18 622.2,2403.84 ; 497.69,3 557.69,3 563.69,328.18 683.69,448.18 683.69,599.69 725.69,641.69 725.69,654.05 805.83,734.19 805.83,955.62 811,960.79 811,991.49 886.2,1066.69 C22.P
  Bottom Layer w12: v1(-77.31,885) -77.31,915.69 -11,982 ; -69.22,2403.84 -9.88,2463.18 562.86,2463.18 622.2,2403.84 681.53,2463.18 1227.33,2463.18 1286.67,2403.84 1346.01,2463.18 1898.44,2463.18 1957.78,2403.84 2036.52,2325.1 2194,2325.1 2554.04,2325.1 2632.78,2403.84 3080.62,1956 EUTS.20 ; 396.51,1636 529.2,1636 C22.P
5V(CAMERA): "R CAM.NO" EUTS.06 | length 946.3
  Bottom Layer w12: 2430.22,2884.16 2658.38,2656 EUTS.06
"Battery Output": "R Battery.NO" "Regulator 3.3.3" "Regulator 5.3" EUTS.49 EUTS.51 MAX471.8 | length 7182.6
  Top Layer w12: 497.69,93.16 426.19,93.16 419.16,86.13 419.16,0.84 473,-53 v1(591,-53) ; 1759.11,2884.16 2254,2389.27 MAX471.8 ; 3114.69,176.16 3202.16,176.16 EUTS.51 EUTS.49
  Bottom Layer w12: v1(591,-53) 706.82,-168.82 2259.69,-168.82 2517.69,89.18 3115.18,89.18 EUTS.51 ; MAX471.8 2610.69,1168.31 2610.69,921.18 2686.69,845.18 2947.69,845.18 3186.69,606.18 3306.69,606.18 3331.69,581.18 3331.69,506.31 EUTS.49
BOOT0: "BOOT PH.2" MCU.94 | length 2646.2
  Top Layer w12: v1(206,1702) 206,1272.12 199.69,1265.81 199.69,839.18 281.69,757.18 281.69,594.69 244,557 ; v1(1444.15,1751.18) MCU.94
  Bottom Layer w12: v1(206,1702) 208.55,1702 232.73,1726.18 313.69,1726.18 357.57,1770.06 448.69,1770.06 461.57,1757.18 1438.15,1757.18 v1(1444.15,1751.18)
"E-RST Hard Reset": EUTS.42
G: "LED 1.2" "LM 35.3" "POWER LED.2" "Regulator 3.3.1" "Regulator 5.1" "T ADCS.1" "T BAT.1" "T CAM.1" "T COMM.1" "T OBC.1" C1.1 C2.1 C3.1 C4.1 C5.2 C9.1 C11.2 C12.2 C13.1 C14.1 C15.1 C16.1 C17.1 C18.1 C19.1 C22.N C23.N C24.2 C32.1 C33.1 C34.1 C35.1 EUTS.11 EUTS.12 EUTS.16 EUTS.29 EUTS.30 EUTS.31 EUTS.32 EUTS.45 EUTS.46 EUTS.50 EUTS.52 LED2.2 LED3.2 LED4.2 MAX471.3 MAX471.4 MAX471.5 MAX471.7 MCU.10 MCU.20 MCU.27 MCU.74 MCU.99 R23.2 R31.1 U.4 | length 4773.7
  Top Layer w12: v1(346,854) 320.72,879.28 C14.1 323,940.46 323,1030.97 330.03,1038 495,1038 503.72,1029.28 C13.1 ; v1(404,2178) 437.02,2144.98 C9.1 ; C11.2 469.98,482.4 490,462.38 v1(490,460) ; C24.2 495.98,306.49 530.46,272 530.46,260 524.3,253.83 524.3,238.3 v1(522,236) ; 497.69,-87.16 578.16,-87.16 v1(610,-119) 613.25,-119 632.25,-100 757,-100 754,-97 C1.1 ; C16.1 692.02,2136.02 v1(746,2190) ; v1(734,726.18) 736.3,728.48 740.62,728.48 751.98,739.83 C12.2 ; LED2.2 894.57,160.09 959.36,95.3 978.7,95.3 v1(981,93) 981,90.62 1001.02,70.6 C18.1 ; LED3.2 971.49,945.27 978.75,938 v1(982,938) ; C17.1 958.02,2179.78 971,2192.75 v1(971,2196) ; R23.2 1031.17,603.98 v1(1051.17,583.98) ; v1(1097,196) 1097,363.98 C4.1 ; LED4.2 1100.71,1855 1114,1868.29 1114,1927.8 1056.21,1985.6 1056.21,1995.54 1196.51,2135.84 1257.84,2135.84 v1(1258,2136) ; v1(1167,1432) 1169.3,1434.3 1169.3,1437.85 1216.5,1485.05 MCU.20 ; v1(1184,1674) 1187.25,1674 1195.15,1681.91 MCU.10 ; v1(1311,-105) 1311,-101.75 1323.69,-89.06 U.4 ; 1345,576.09 1359.57,576.09 1425.7,509.95 1425.7,492.3 v1(1428,490) ; MCU.27 1345.72,1371.85 1365.83,1391.95 v1(1365.83,1394.17) ; MCU.99 1345.82,1925.9 1345.82,1891.77 1354.12,1883.47 1373.59,1883.47 1411,1846.06 v1(1411,1845.06) ; v1(1555,388) 1555,389.46 1614.02,448.49 C3.1 ; C19.1 1631.05,-86.87 1659.18,-115 v1(1660,-115) ; C5.2 1851.98,83.98 1841.27,73.27 1840.51,73.27 1821.25,54 v1(1818,54) 1816.54,52.54 1816.54,17 1867.02,-33.49 C2.1 ; v1(1859,1915) 1861.3,1912.7 1865.59,1912.7 1907.94,1870.36 1907.94,1847.78 1899.63,1839.48 1865.5,1839.48 MCU.74 ; C33.1@1865.98,472 C33.1 1874,418.25 1869,413.25 v1(1869,410) 1936.57,477.57 1936.57,494.1 2017.49,575.02 C32.1 ; v1(1985,187) 2064,108 2064,82.38 2077.29,69.09 2088,69.09 ; C34.1 2006.51,295.02 2079.7,221.83 2079.7,206.3 v1(2082,204) ; v1(2198,20) 2201.25,20 2217.22,4.02 C35.1 ; R31.1 2226.02,274.49 2244.68,255.83 2248.17,255.83 v1(2306,198) ; v1(2486,-10) 2488.3,-7.7 2498.83,-7.7 2543.02,36.49 C15.1 ; 3114.69,-4.16 3217.16,-4.16 v1(3241,-28)
"NetBOOT PH_1": "BOOT PH.1" R23.1 | length 887.4
  Top Layer w12: v1(982,455) 982,458.25 987,463.25 R23.1
  Bottom Layer w12: 244,457 323.02,536.02 900.98,536.02 v1(982,455)
"NetBOOT PH_3": "BOOT PH.3" R24.1 | length 2675.3
  Top Layer w12: v1(2412,341) 2376.69,305.69 2376.69,52.82 2411.49,18.02 R24.1
  Bottom Layer w12: 244,657 933.77,657 1040.59,550.18 1937.69,550.18 2169.69,318.18 2389.18,318.18 v1(2412,341)
NetC1_2: C1.2 R1.1 Y1.2 | length 2436.5
  Top Layer w12: C1.2 815.98,-82.82 841.69,-82.82 927.69,3.18 927.69,75.18 916.69,86.18 846.69,86.18 784.69,148.18 784.69,390.18 763.69,411.18 763.69,635.68 796.19,668.18 1012.69,668.18 v1(1042.69,638.18) ; Y1.2 v1(1210.69,627.21) ; v1(1795,607) 1777,589 1777,355.19 1784.03,348.16 1786.37,348.16 1802.02,332.51 R1.1
  Bottom Layer w12: v1(1042.69,638.18) 1271.69,638.18 1298.69,611.18 ; v1(1210.69,627.21) 1226.72,611.18 1298.69,611.18 ; v1(1795,607) 1553.23,607 1547.31,601.09 1308.79,601.09 1298.69,611.18
NetC2_2: C2.2 R2.1 Y1.1 | length 1958.4
  Top Layer w12: v1(1105.69,484.18) 1105.69,528.79 Y1.1 1095.17,540.31 1095.17,1060.66 1136.69,1102.18 1186.02,1102.18 R2.1 ; v1(1706.69,313.18) 1779.1,240.77 1896.1,240.77 1934.98,201.9 C2.2
  Bottom Layer w12: v1(1105.69,484.18) 1334.69,484.18 1505.69,313.18 v1(1706.69,313.18)
NetC3_2: C3.2 R3.1 Y2.2 | length 3932.7
  Top Layer w12: v1(169,494) 170.69,495.69 170.69,1930.18 140.05,1960.82 -44.95,1960.82 -79.31,1995.18 -79.31,2111.18 -69.31,2121.18 183.02,2121.18 R3.1 ; v1(1430,319) 1433.25,319 1452.6,299.65 1566.62,299.65 1633.58,366.61 1647.4,366.61 1681.98,401.18 C3.2
  Bottom Layer w12: v1(169,494) 169,534.9 228.51,594.41 544.11,594.41 583.5,555.02 982.01,555.02 1079.18,457.85 1318.08,457.85 1372.89,403.04 1372.89,376.11 v1(1430,319)
NetC4_2: C4.2 R4.1 Y2.1 | length 569.3
  Top Layer w12: C4.2 1168.98,362.49 1194.28,337.18 R4.1 1275.72,284.18 1298.69,261.21 1298.69,161.18 1324.34,135.54 1541.76,135.54 Y2.1
NetC8_1: C8.1 C10.2 | length 187.2
  Top Layer w12: C8.1 918.02,1865.85 990.98,1792.9 C10.2
NetLED2_1: LED2.1 R9.1 | length 323.1
  Top Layer w12: R9.1 628.02,-9.15 646.69,-27.82 755.69,-27.82 828.64,45.13 LED2.1
NetLED3_1: LED3.1 R10.1 | length 373
  Top Layer w12: LED3.1 985.31,830.31 1000.73,845.73 1000.73,863.49 1020,882.75 v1(1020,886) ; v1(1121,867) 1121,909.46 1151.02,939.49 R10.1
  Bottom Layer w12: v1(1020,886) 1098.75,886 1117.75,867 v1(1121,867)
NetLED4_1: LED4.1 R11.1 | length 1555
  Top Layer w12: R11.1 890.02,381.18 975.69,381.18 1055,460.49 1055,552.45 1076.17,573.62 1076.17,1322.83 1055,1344 1055,1695.04 LED4.1
NetMAX471_6: MAX471.6 R31.2 | length 1491.1
  Top Layer w12: R31.2 2293.98,279.18 2316.69,279.18 2328.69,291.18 2328.69,1062.18 2663.69,1397.18 2663.69,1503.14 2686.69,1526.14 MAX471.6
NetR32_1: "T COMM.2" R32.1 | length 3105.7
  Top Layer w12: R32.1 197.02,146.02 v1(247,196)
  Bottom Layer w12: v1(247,196) 1061.64,196 1094.64,229 2310.36,229 2317.36,222 2430.51,222 2587.69,379.18 2847.87,379.18 3007.69,539 3063.16,539
NetR33_1: "T ADCS.2" R33.1 | length 3137.1
  Top Layer w12: R33.1 1584.53,2061.02 1598.83,2075.32 1598.83,2116.32 1646.69,2164.18 1733.69,2164.18 1993.83,1904.05 1993.83,1453.05 2159.69,1287.18 2159.69,434.18 2172.37,421.51 2172.37,162.63 2180,155 2344.66,155 2351.69,162.03 2351.69,331.18 2396.51,376 2462.87,376 2573.87,265 2624,265
NetR34_1: "T CAM.2" R34.1 | length 2290.3
  Top Layer w12: R34.1 1690.51,2061.02 1725.67,2096.18 1738.57,2096.18 1744.28,2090.48 v1(1765.7,2090.48)
  Bottom Layer w12: v1(1765.7,2090.48) 1768,2088.18 1943.06,2088.18 1951.06,2096.18 2124.69,2096.18 2175.69,2045.18 2175.69,1444.18 2497.69,1122.18 2497.69,962.18 2782,677.87 2782,539
NetR35_1: "T BAT.2" R35.1 | length 1248.6
  Top Layer w12: R35.1 1573.73,-96.98 1578.75,-102 v1(1582,-102) ; v1(2227,198) 2191.37,233.63 2191.37,324.18 2243.98,376.79 2243.98,539
  Bottom Layer w12: v1(1582,-102) 1582.51,-101.49 1582.51,-72 1652.69,-1.82 2034.69,-1.82 2129.7,93.19 2129.7,100.7 v1(2227,198)
NetR36_1: "T OBC.2" R36.1 | length 1396.2
  Top Layer w12: v1(1493.69,432.18) 1493.69,484.02 R36.1
  Bottom Layer w12: v1(1493.69,432.18) 1574.69,513.18 1939.69,513.18 2160.69,292.18 2416.69,292.18 2504,379.49 2504,539
"NetR ADCS_A2": "R ADCS.A2" "T ADCS.3" | length 3465.3
  Top Layer w12: v1(2283.21,2121.18) 2340.82,2121.18 2839,1623 2839,748.49 2623.69,533.18 2623.69,315 2624,315
  Bottom Layer w12: 1094.64,2403.84 1136.69,2403.84 1419.35,2121.18 v1(2283.21,2121.18)
"NetR Battery_A2": "R Battery.A2" "T BAT.3" | length 2086.4
  Top Layer w12: 1759.11,2403.84 2063.69,2099.26 2063.69,1571.18 2293.98,1340.9 2293.98,539
"NetR CAM_A2": "R CAM.A2" "T CAM.3" | length 2052.8
  Top Layer w12: 2430.22,2403.84 2858,1976.06 2858,579.37 2832,553.37 2832,539
"NetR COMM_A2": "R COMM.A2" "T COMM.3" | length 1832.3
  Top Layer w12: 3063.16,589 3105.22,631.06 3105.22,2403.84
"NetR OBC_A2": "R OBC.A2" "T OBC.3" | length 3414.6
  Bottom Layer w12: 403.22,2403.84 743.88,2063.18 1868.69,2063.18 2138.69,1793.18 2138.69,1228.18 2554,812.87 2554,539
NRST: "Power - Burn - UART2 PH.4" C5.1 MCU.14 R5.2 | length 5229.6
  Top Layer w12: v1(676,115) 676,230.51 710.67,265.18 ; R5.2 710.67,265.18 ; v1(727,98) 727,157.36 744.69,175.05 744.69,231.16 710.67,265.18 ; v1(1125,1501) 1125,1569.22 1159.72,1603.94 1231.25,1603.94 1231.93,1603.26 1259.02,1603.26 MCU.14 ; v1(1763,96) 1763,96.38 1784.02,117.4 C5.1
  Bottom Layer w12: v1(676,115) -64.13,115 -102.31,153.18 -102.31,1190.69 -11,1282 41.18,1334.18 719.78,1334.18 830.58,1223.38 938.59,1223.38 987.38,1272.17 987.38,1363.38 v1(1125,1501) ; v1(727,98) 749,76 749,30.87 780.69,-0.82 1367.69,-0.82 1389.69,-22.82 1585.69,-22.82 1708.51,100 1731.75,100 1733.46,98.3 1760.7,98.3 v1(1763,96)
OSC32_IN: MCU.8 R1.2 | length 2919.7
  Top Layer w12: MCU.8 1211.69,1721.28 1211.69,1899.18 1165.69,1945.18 1165.69,2009.18 1201.69,2045.18 1458.82,2045.18 1500.82,2003.18 1847.69,2003.18 1974.69,1876.18 1974.69,812.18 2063.69,723.18 2063.69,541.18 2027.98,519.18 1869.98,361.18 R1.2
OSC32_OUT: MCU.9 R2.2 | length 1831
  Top Layer w12: R2.2 1253.98,1022.82 1272.63,1004.17 1272.63,861.24 1370.36,763.51 1373.87,760 1502.66,760 1509.69,767.03 1509.69,1051.31 1471.98,1089.02 1395.69,1089.02 1306.69,1178.02 1306.69,1374.72 1317,1385.03 1317,1454.52 1349.13,1486.64 1349.13,1487.13 1356.48,1494.48 1356.48,1532.33 1435,1610.85 1435,1685.03 1418.44,1701.59 1369.46,1701.59 1355.05,1687.18 1334.34,1687.18 1319.93,1701.59 MCU.9
OSC_IN: MCU.12 R3.2 | length 1675.5
  Top Layer w12: R3.2 250.98,2090.49 303.17,2038.3 326.7,2038.3 v1(329,2036) ; v1(1175,1873) 1149.86,1847.86 1149.86,1810.41 1179.86,1780.41 1179.86,1719.84 1152.69,1692.67 1152.69,1649.56 1159.72,1642.54 MCU.12
  Bottom Layer w12: v1(329,2036) 364.18,2071.18 675.69,2071.18 707.07,2039.8 1274.17,2039.8 1281.2,2032.77 1281.2,1951.69 1204.81,1875.3 1177.3,1875.3 v1(1175,1873)
OSC_OUT: MCU.13 R4.2 | length 1610.7
  Top Layer w12: MCU.13 1340.15,1622.85 v1(1372,1591) ; R4.2 1343.67,371.18 1485.69,381.18 1547.69,443.18 1547.69,1171.18 v1(1481.69,1237.18)
  Bottom Layer w12: v1(1372,1591) 1481.69,1481.31 v1(1481.69,1237.18)
PA2: "Power - Burn - UART2 PH.8" MCU.25 U.3 | length 3722.3
  Top Layer w12: v1(240.69,1130.31) 240.69,851.64 306.69,785.64 306.69,14.18 489.69,-168.82 1143.69,-168.82 1273.69,-38.82 U.3 ; v1(1240.69,1317.1) 1240.69,1386.53 1240.79,1386.63 MCU.25
  Bottom Layer w12: 89,1282 166.62,1204.38 ; v1(240.69,1130.31) 166.62,1204.38 ; v1(1240.69,1317.1) 1127.97,1204.38 166.62,1204.38
PA3: "Power - Burn - UART2 PH.7" MCU.26 U.2 | length 3928.4
  Top Layer w12: v1(1179,300) 1181.3,297.7 1206.26,297.7 1215,288.97 1227.91,288.97 1247.69,269.18 1247.69,162.18 1223.69,138.18 U.2 ; MCU.26 1326.04,1215.44 1331.69,1209.78 v1(1331.69,1206.54)
  Bottom Layer w12: 89,1182 47.69,1140.69 47.69,1061.18 ; v1(1179,300) 1112.82,366.18 621.69,366.18 564.69,423.18 514.69,423.18 475.06,383.55 203.33,383.55 132.69,454.18 -33.31,454.18 -62.52,483.39 -62.52,845.97 47.69,956.18 47.69,1061.18 ; v1(1331.69,1206.54) 1329.4,1204.24 1324.24,1204.24 1161.18,1041.18 67.69,1041.18 47.69,1061.18
PA4: "Relay - I2C1 PH.1" MCU.29 R33.2 | length 3943
  Top Layer w12: MCU.29 1385.09,1370.7 1399.4,1385 1399.4,1414.25 v1(1400.15,1415) ; R33.2 1543.69,2128.98 1543.69,2165.18 1566.69,2188.18 1841.36,2188.18 2023.69,2005.85 v1(2023.69,1839.18)
  Bottom Layer w12: -11,1532.13 55.79,1465.34 625.73,1465.34 848.69,1242.38 923.69,1242.38 923.69,1403.69 1062.18,1542.18 1209.96,1542.18 1323.65,1428.49 1333.59,1428.49 1349.13,1444.02 1349.13,1565.54 1347.66,1567 ; v1(1400.15,1415) 1402.45,1417.3 1422.2,1417.3 1435.48,1430.58 1435.48,1479.18 1347.66,1567 ; v1(2023.69,1839.18) 1947.69,1839.18 1780.69,1672.18 1347.69,1672.18 1331.69,1688.18 1279.69,1688.18 1279.69,1621.02 1306.69,1594.02 1320.65,1594.02 1347.66,1567
PA5: "Relay - I2C1 PH.2" MCU.30 R32.2 | length 3236.1
  Top Layer w12: -11,1632.13 46.69,1574.44 46.69,958.18 ; v1(73,890) 73,931.87 46.69,958.18 ; R32.2 122.9,213.98 46.69,290.18 46.69,958.18 ; MCU.30 1404.78,1175.1 v1(1447.69,1132.18)
  Bottom Layer w12: v1(73,890) 164.18,981.18 1296.69,981.18 v1(1447.69,1132.18)
PA6: "Relay - I2C1 PH.3" MCU.31 R34.2 | length 3350.4
  Top Layer w12: v1(1116.69,1989.18) 1206.69,2079.18 1451.69,2079.18 1506.69,2024.18 1606.69,2024.18 1617.83,2035.32 1617.83,2101.18 1645.63,2128.98 R34.2 ; v1(1190.69,1972.18) 1275.69,1887.18 1286.69,1887.18 1419.15,1754.73 1419.15,1740.83 1500.53,1659.45 1500.53,1649.51 1381.48,1530.46 1381.48,1456.16 1397.64,1440 1418.12,1440 1425.15,1432.97 1425.15,1347.47 1424.56,1346.88 1424.56,1319.8 MCU.31
  Bottom Layer w12: -11,1732.13 -52.31,1773.44 -52.31,1861.18 -35.31,1878.18 824.69,1878.18 ; v1(1116.69,1989.18) 1099.69,1972.18 ; v1(1190.69,1972.18) 1099.69,1972.18 ; 824.69,1878.18 1005.69,1878.18 1099.69,1972.18 ; 824.69,1878.18 918.69,1972.18 1099.69,1972.18
PA7: "Relay - I2C1 PH.4" MCU.32 R36.2 | length 3181.2
  Top Layer w12: R36.2 1512.51,551.98 1528.17,567.63 1528.17,574.13 1528.69,574.66 1528.69,1134.72 1444.15,1219.26 MCU.32 1444.15,1505.64 v1(1714.69,1776.18)
  Bottom Layer w12: -11,1832.13 30.95,1790.18 171.05,1790.18 207.93,1827.06 514.57,1827.06 521.57,1820.06 1499.2,1820.06 1521.32,1842.18 1648.69,1842.18 v1(1714.69,1776.18)
PA13: "Power - Burn - UART2 PH.5" MCU.72 | length 2338.8
  Top Layer w12: MCU.72 1907.69,1800.02 1930.65,1777.06 v1(1930.65,1618.14)
  Bottom Layer w12: 89,982 117.18,1010.18 1243,1010.18 1426,1193.18 1505.69,1193.18 v1(1930.65,1618.14)
PA14: "Power - Burn - UART2 PH.6" MCU.76 | length 2142.4
  Top Layer w12: v1(1408,1465) 1405.7,1467.3 1405.7,1494.54 1400.48,1499.77 1400.48,1522.59 1760.07,1882.18 1798.48,1882.18 MCU.76
  Bottom Layer w12: 89,1082 1040.95,1082 1269.85,1310.91 1269.85,1333.55 1334.43,1398.13 1395.44,1459.14 1398.89,1459.14 1404.75,1465 v1(1408,1465)
PB0: "LED-ADC2 IN8,9,14,15 PH.5" MAX471.1 MCU.35 | length 3490.8
  Top Layer w12: 97,395 168.71,466.71 186.69,466.71 206.59,486.61 206.59,735.72 v1(208.43,737.57) ; MCU.35 1503.2,1258.17 1516.2,1258.17 1575.69,1198.69 v1(1575.69,737) ; v1(2378.69,827.18) 2454,902.49 MAX471.1
  Bottom Layer w12: v1(208.43,737.57) 264.03,737.57 300.41,701.18 1553.18,701.18 v1@1582.35,730.35 ; v1(1575.69,737) v1@1582.35,730.35 ; v1(2378.69,827.18) 2252.69,701.18 1816.46,701.18 1787.3,730.35 v1@1582.35,730.35
PB1: "LED-ADC2 IN8,9,14,15 PH.6" MAX471.2 MCU.36 | length 3659.7
  Top Layer w12: MCU.36 1522.89,1276.18 1566.69,1276.18 1655,1187.87 v1(1655,640) ; v1(2455.69,643.18) 2554,741.49 MAX471.2
  Bottom Layer w12: 97,495 183.69,581.69 183.69,651.41 226.69,694.41 266.46,694.41 284.87,676 1260.74,676 1296.74,640 v1(1655,640) 1656.59,641.59 2454.1,641.59 v1(2455.69,643.18)
PB6: "Relay - I2C1 PH.7" MCU.92 | length 1638.6
  Top Layer w12: MCU.92 1483.52,1880.36 v1(1546.69,1817.18)
  Bottom Layer w12: 89,1732.13 158.64,1732.13 217.6,1791.09 293.29,1791.09 310.27,1808.06 500.81,1808.06 513.69,1795.18 1524.69,1795.18 v1(1546.69,1817.18)
PB7: "Relay - I2C1 PH.8" MCU.93 | length 1551.1
  Top Layer w12: v1(1252,2014.8) 1253.65,2014.8 1265.03,2026.18 1406.83,2026.18 1463.83,1969.18 MCU.93
  Bottom Layer w12: 89,1832.13 114.05,1857.18 540.57,1857.18 558.69,1839.06 1094.03,1839.06 1216.15,1961.18 1216.15,1985.15 1226.53,1995.53 1229.49,1995.53 1248.75,2014.8 v1(1252,2014.8)
PC4: "LED-ADC2 IN8,9,14,15 PH.7" "LM 35.2" "Relay - I2C1 PH.5" MCU.33 | length 3180
  Top Layer w12: 89,1532.13 137.69,1483.44 137.69,635.69 97,595 ; MCU.33 1463.83,1476.83 v1(1702,1715)
  Bottom Layer w12: 89,1532.13 242.87,1686 396.51,1686 467.51,1686 519.69,1738.18 1380.69,1738.18 1408.69,1710.18 1551.31,1710.18 1556.13,1715 v1(1702,1715)
PC5: "LED-ADC2 IN8,9,14,15 PH.8" MCU.34 | length 3237.8
  Top Layer w12: MCU.34 1483.52,1358.01 v1(1563.97,1438.46)
  Bottom Layer w12: 97,695 188.76,786.76 1618.27,786.76 1974.83,1143.32 1974.83,1661.96 1974.65,1662.14 1799.65,1662.14 1575.97,1438.46 v1(1563.97,1438.46)
PD10: "Relay - I2C1 PH.6" MCU.57 R35.2 | length 5522.2
  Top Layer w12: v1(-52.31,156.18) -52.31,1661.18 -22.05,1691.44 29.69,1691.44 89,1632.13 ; v1(1410.69,10.18) 1449.9,-29.02 R35.2 ; v1(1764.69,1713.18) 1764.69,1709.93 1758.69,1703.93 1758.69,1445.05 1772.74,1431 1791.67,1431 1822.88,1462.21 1822.88,1473.76 1822.88,1496.35 1830.5,1503.96 1837.55,1503.96 1838.23,1504.64 1865.31,1504.64 MCU.57
  Bottom Layer w12: v1(-52.31,156.18) 724.69,156.18 847.69,33.18 1387.69,33.18 v1(1410.69,10.18) ; 89,1632.13 227.05,1770.18 303.5,1770.18 322.38,1789.06 481.76,1789.06 494.64,1776.18 1664.46,1776.18 1689.79,1750.86 1727.02,1750.86 v1(1764.69,1713.18)
PD12: "LED 1.1" "LED-ADC2 IN8,9,14,15 PH.1" MCU.59 | length 3074.9
  Top Layer w12: v1(1196.69,1036.18) 1253.63,979.24 1253.63,671.21 1254.69,670.15 1254.69,574.18 1345,483.87 1345,461.13 1302.69,461.13 v1(1219.75,378.18) ; v1(1783.69,1520.69) 1807.11,1544.11 MCU.59
  Bottom Layer w12: -3,395 64.82,327.18 982.72,327.18 1060.88,249.02 1176.53,249.02 1219.75,292.24 v1(1219.75,378.18) ; v1(1196.69,1036.18) 1372.69,1212.18 1496.69,1212.18 1639.04,1354.53 1639.04,1376.04 v1(1783.69,1520.69)
PD13: "LED-ADC2 IN8,9,14,15 PH.2" MCU.60 R9.2 | length 4048
  Top Layer w12: R9.2 695.98,10.18 758.69,10.18 769.69,21.18 769.69,125.18 763.69,131.18 763.69,359.18 744.69,378.18 744.69,646.18 798.69,700.18 884.69,700.18 v1(917.69,733.18) ; MCU.60 1865.5,1563.7 1899.64,1563.7 1930.69,1532.64 1930.69,1506.54 1924.69,1500.54 1924.69,1479.83 1937,1467.52 v1(1937,781)
  Bottom Layer w12: -3,495 56.18,554.18 126.69,554.18 137.69,565.18 137.69,702.18 200.69,765.18 949.69,765.18 ; v1(917.69,733.18) 949.69,765.18 ; v1(1937,781) 1828.23,889.77 1818.29,889.77 1693.69,765.18 949.69,765.18
PD14: "LED-ADC2 IN8,9,14,15 PH.3" MCU.61 R10.2 | length 2944.7
  Top Layer w12: v1(1218.98,884.18) R10.2 ; v1(1783.69,1594) 1786.94,1594 1797.46,1583.48 MCU.61
  Bottom Layer w12: -3,595 -43.52,635.52 -43.52,725.31 131.35,900.18 366.69,900.18 428.87,838 1143.65,838 1149.64,844 1178.8,844 v1(1218.98,884.18) 1255.69,884.18 1955.65,1584.14 1955.65,1631.18 1943.69,1643.14 1832.83,1643.14 v1(1783.69,1594)
PD15: "LED-ADC2 IN8,9,14,15 PH.4" MCU.62 R11.2 | length 3143.4
  Top Layer w12: R11.2 947.98,351.18 982.69,351.18 1081.69,450.18 1146.69,450.18 1229.69,533.18 1235.69,608.18 1235.69,652.18 1154.69,733.18 1154.69,771.81 1160,777.12 v1(1160,819) ; MCU.62 1906.89,1603.17 1949.69,1560.37 v1(1949.69,1490.18)
  Bottom Layer w12: -3,695 121,819 v1(1160,819) 1278.51,819 v1(1949.69,1490.18)
"RD + (OBC-ADCS)": EUTS.21
"RD + (OBC-COMM)": EUTS.41
"RD + (OBC-EPS)": EUTS.01 R25.1 U.5 | length 5729.4
  Top Layer w12: R25.1 838.69,533.02 v1(893.69,478.02) ; U.5 1323.69,263.18 1336.69,276.18 1358.57,276.18 1374.75,260 v1(1378,260) 1423,215 1670.87,215 1716,169.87 1716,58 1760,14 1760,-27.13 1842.69,-109.82 2094.69,-109.82 2157.51,-47 2372.64,-47 2374.64,-45 2612.51,-45 3130.69,473.18 3130.69,1790.18 3146.69,1806.18 3407.69,1806.18 3422.69,1821.18 3422.69,2815.31 EUTS.01
  Bottom Layer w12: v1(893.69,478.02) 961.53,410.18 1255.82,410.18 1376,290 1376,262 v1(1378,260)
"RD - (OBC-ADCS)": EUTS.19
"RD - (OBC-COMM)": EUTS.39
"RD - (OBC-EPS)": EUTS.02 R25.2 U.6 | length 6495.1
  Top Layer w12: R25.2 804,599.18 830.69,599.18 918.69,511.18 918.69,461.18 844.69,387.18 844.69,296.18 1146.69,-5.82 1146.69,-21.82 1156.69,-31.82 1249.69,-31.82 1249.69,80.18 1273.69,104.18 1273.69,147.18 ; U.6 1273.69,147.18 ; EUTS.02 3331.18,2905.18 3417.69,2905.18 3441.69,2881.18 3441.69,1641.18 3396.69,1596.18 3246.69,1596.18 3221.69,1571.18 3221.69,408.18 2929.69,116.18 2929.69,-6.82 2872.51,-64 2382.51,-64 2300.51,-146 1434.87,-146 1367.69,-78.82 1367.69,53.18 1273.69,147.18
"RST Soft-Reset": EUTS.25
"Solar Array Input": "R Battery.COM" EUTS.24 | length 1994.8
  Bottom Layer w12: 1522.89,2325.1 1689.81,2158.18 2812.69,2158.18 3214.87,1756 EUTS.24
"TD + (OBC-ADCS)": EUTS.17
"TD + (OBC-COMM)": EUTS.37
"TD + (OBC-EPS)": EUTS.03 R26.1 U.8 | length 6396
  Top Layer w12: v1(539.69,398.18) 539.69,521.18 588.53,570.02 ; R26.1 588.53,570.02 ; v1(714.69,2831.18) 714.69,2276.18 648.69,2210.18 648.69,1601.18 285.69,1238.18 285.69,860.38 421.02,725.05 421.02,698.98 549.98,570.02 588.53,570.02 ; v1(1125,296) 1163.83,257.17 1163.83,252.54 1173.69,242.68 U.8
  Bottom Layer w12: v1(539.69,398.18) 590.69,347.18 1001.72,347.18 1080.88,268.02 1102.07,268.02 1109.1,275.04 1109.1,276.86 1125,292.75 v1(1125,296) ; v1(714.69,2831.18) 875.69,2992.18 3080.69,2992.18 3257.69,2815.18 3322.82,2815.18 EUTS.03
"TD - (OBC-ADCS)": EUTS.15
"TD - (OBC-COMM)": EUTS.35
"TD - (OBC-EPS)": EUTS.04 R26.2 U.7 | length 6244.2
  Top Layer w12: v1(532,628) 534.3,630.3 560.32,630.3 568,637.98 R26.2 ; R26.2@617.69,637.98 617.69,996.18 742.69,1121.18 742.69,1891.18 826.75,1975.24 964.75,1975.24 1204.69,2215.18 v1(1204.69,2814.18) ; U.7 1223.69,167.18 1218.69,162.18 1086.69,162.18 1055.55,193.33 1055.55,397.17 1089.56,431.18 1154.56,431.18 1242.56,519.18 1245.45,519.18 1251.45,525.18 v1(1254.69,525.18)
  Bottom Layer w12: v1(532,628) 935.9,628 1038.72,525.18 v1(1254.69,525.18) ; v1(1204.69,2814.18) 1311.69,2814.18 1433.69,2936.18 2464.69,2936.18 2589.69,2811.18 3226.82,2811.18 EUTS.04
"UART-Rx (OBC-CAM)": EUTS.38
"UART-Tx (OBC-CAM)": EUTS.36
VBAT: C12.1 MCU.6 R14.2 | length 1510.6
  Top Layer w12: C12.1 683.02,786 683.02,839.18 754.67,910.83 R14.2 754.67,970.18 848.69,1064.21 v1(848.69,1543.18) ; MCU.6 1296.23,1760.65 v1(1344.69,1712.18)
  Bottom Layer w12: v1(848.69,1543.18) 943.69,1638.18 1211.69,1638.18 1260.69,1687.18 1260.69,1707.18 1339.69,1707.18 v1(1344.69,1712.18)
VCAP_1: C34.2 C35.2 MCU.49 | length 1915.3
  Top Layer w12: MCU.49 1778.79,1260.18 1713,1194.39 1713,527 1742,498 1742,310.87 1766.69,286.18 1906.69,286.18 1918.69,298.18 1918.69,321.18 1960.49,362.98 C34.2 2143.04,362.98 2153.37,352.65 2153.37,125.3 2206.69,71.98 C35.2
VCAP_2: C32.2 C33.2 MCU.73 | length 1612.6
  Top Layer w12: MCU.73 1831.21,1819.7 1739.69,1728.18 1739.69,1437.18 1900,1276.87 1900,573.98 1895.17,569.14 1895.17,563.63 1879.51,547.98 C33.2 1888.69,547.98 1983.69,642.98 C32.2
VDDA: C8.2 C9.2 Inductor.1 MCU.22 R13.2 | length 4592.5
  Top Layer w12: R13.2 23.98,2079.18 86.33,2079.18 166.69,1998.82 462.62,1998.82 504.98,2041.18 C9.2 504.98,2672.47 699.69,2867.18 868.69,2867.18 924.69,2811.18 1129.69,2811.18 1160.69,2842.18 1221.69,2842.18 1338.69,2725.18 1338.69,2304.9 985.98,1952.18 C8.2 985.98,1827.18 998.98,1814.18 1119.22,1814.18 1160.86,1772.54 1160.86,1727.71 1096,1662.85 1096,1421 1203.2,1313.8 ; MCU.22 1259.02,1445.59 1231.93,1445.59 1231.25,1444.9 1224.2,1444.9 1216.58,1437.29 1216.58,1436.32 1209.55,1429.29 1203.2,1429.29 1203.2,1313.8 ; Inductor.1 1428,1008.87 1203.2,1233.68 1203.2,1313.8
VREF+: C10.1 C11.1 MCU.21 R13.1 | length 4330.8
  Top Layer w12: R13.1 -43.98,2012.49 -11.31,1979.82 198.69,1979.82 266.69,1911.82 266.69,852.51 402.02,717.18 C11.1 402.02,493.85 525.69,370.18 554.69,370.18 658.69,474.18 658.69,702.18 647.69,713.18 647.69,979.18 809.69,1141.18 809.69,1597.18 923.02,1710.51 ; v1(923.02,1561.18) 923.02,1710.51 ; C10.1 923.02,1710.51 ; MCU.21 1259.21,1465.46 1293.34,1465.46 1324.13,1496.25 v1(1324.13,1497)
  Bottom Layer w12: v1(923.02,1561.18) 1318.13,1561.18 1325.16,1554.15 1325.16,1498.03 v1(1324.13,1497)
pads on no net: "R ADCS.NC" "R Battery.NC" "R CAM.NC" "R COMM.NC" "R OBC.NC" "Regulator 3.3.4" "Regulator 5.4" EUTS.05 EUTS.07 EUTS.09 EUTS.13 EUTS.14 EUTS.23 EUTS.26 EUTS.27 EUTS.33 EUTS.34 EUTS.40 EUTS.43 EUTS.44 EUTS.47 EUTS.48 MCU.1 MCU.2 MCU.3 MCU.4 MCU.5 MCU.7 MCU.15 MCU.16 MCU.17 MCU.18 MCU.23 MCU.24 MCU.37 MCU.38 MCU.39 MCU.40 MCU.41 MCU.42 MCU.43 MCU.44 MCU.45 MCU.46 MCU.47 MCU.48 MCU.51 MCU.52 MCU.53 MCU.54 MCU.55 MCU.56 MCU.58 MCU.63 MCU.64 MCU.65 MCU.66 MCU.67 MCU.68 MCU.69 MCU.70 MCU.71 MCU.77 MCU.78 MCU.79 MCU.80 MCU.81 MCU.82 MCU.83 MCU.84 MCU.85 MCU.86 MCU.87 MCU.88 MCU.89 MCU.90 MCU.91 MCU.95 MCU.96 MCU.97 MCU.98

## Polygon pours and split planes (outlines as drawn)
G on Ground (split plane): 175 vertices, not listed, extent -173.26,-178.78 3544.52,3336.26
3.3V on Power (split plane): 175 vertices, not listed, extent -173.26,-178.78 3544.52,3336.26

## Silkscreen, mask and mechanical layers (free items; w line width, h text height)
Top Overlay:
  text "EPS BOARD" at 2406,1973 h60
  text "AL AZHAR UNIVERSITY" at 2140,1855 h60
  text "+" at 1068,1686.67 h20
  text "+" at 861,764.67 h20
  text "+" at 1344,401.67 h20
  text "+" at 882,-11.33 h20
  text "+" at 2073,-109.33 h20
Mechanical 1:
  lines w10: -193.31,-120.08 ccw(c-153.94,-120.08) -153.94,-159.45 114.17,-159.45 cw(c114.17,-223.13) 159.2,-178.1 161.27,-180.17 ccw(c206.3,-135.14) 206.3,-198.82 2272.83,-198.82 ccw(c2272.83,-150.82) 2306.78,-184.76 2368.42,-123.11 cw(c2402.36,-157.05) 2402.36,-109.06 3525.2,-109.05 ccw(c3525.2,-69.68) 3564.57,-69.68 3564.57,285.43 ccw(c3513.72,285.43) 3549.67,321.39 3528.54,342.52 3502.04,369.03 cw(c3532.62,399.61) 3489.37,399.61 3489.37,2671.26 cw(c3582.52,2671.26) 3516.65,2737.12 3535.32,2755.79 ccw(c3469.45,2821.65) 3562.6,2821.65 3562.6,3131.5 ccw(c3523.23,3131.5) 3523.23,3170.87 3218.5,3170.87 cw(c3218.5,3276.37) 3143.9,3201.77 3020.27,3325.4 ccw(c2945.67,3250.8) 2945.67,3356.3 292.91,3356.3 287.48,3356.3 ccw(c287.48,3289.09) 239.96,3336.61 cw(c192.44,3384.14) 192.44,3316.93 187.01,3316.93 -153.94,3316.93 ccw(c-153.94,3277.56) -193.31,3277.56 -193.31,-120.08

## Text inside footprints (layer, text, board x,y; h text height)
MAX471: Top Overlay "Vin" at 2229,1591.14 h20.63; Top Overlay "GND" at 2424,1586.14 h20.63; Top Overlay "Vout" at 2724,1591.14 h20.63; Top Overlay "GND" at 2929,1596.14 h20.63; Top Overlay "VT" at 2444,1046.14 h20.63; Top Overlay "AT" at 2544,1041.14 h20.63; Top Overlay "GND" at 2626,1055 h20.63; Top Overlay "GND" at 2729,1051.14 h20.63